# Altium PCB Morpheus_middle.PcbDoc (part 1 of 3)
Units mm, origin at the board's own origin, x right, y up, seen from the top; angles counter-clockwise.
Board outline 54.01 x 53.97 mm, 6 copper layers (Top Layer, Signal Layer 1, Signal Layer 2, GND, PWR, Bottom Layer), stack 0.657 mm thick; 151 components, 110 nets, 517 pads, 447 vias.
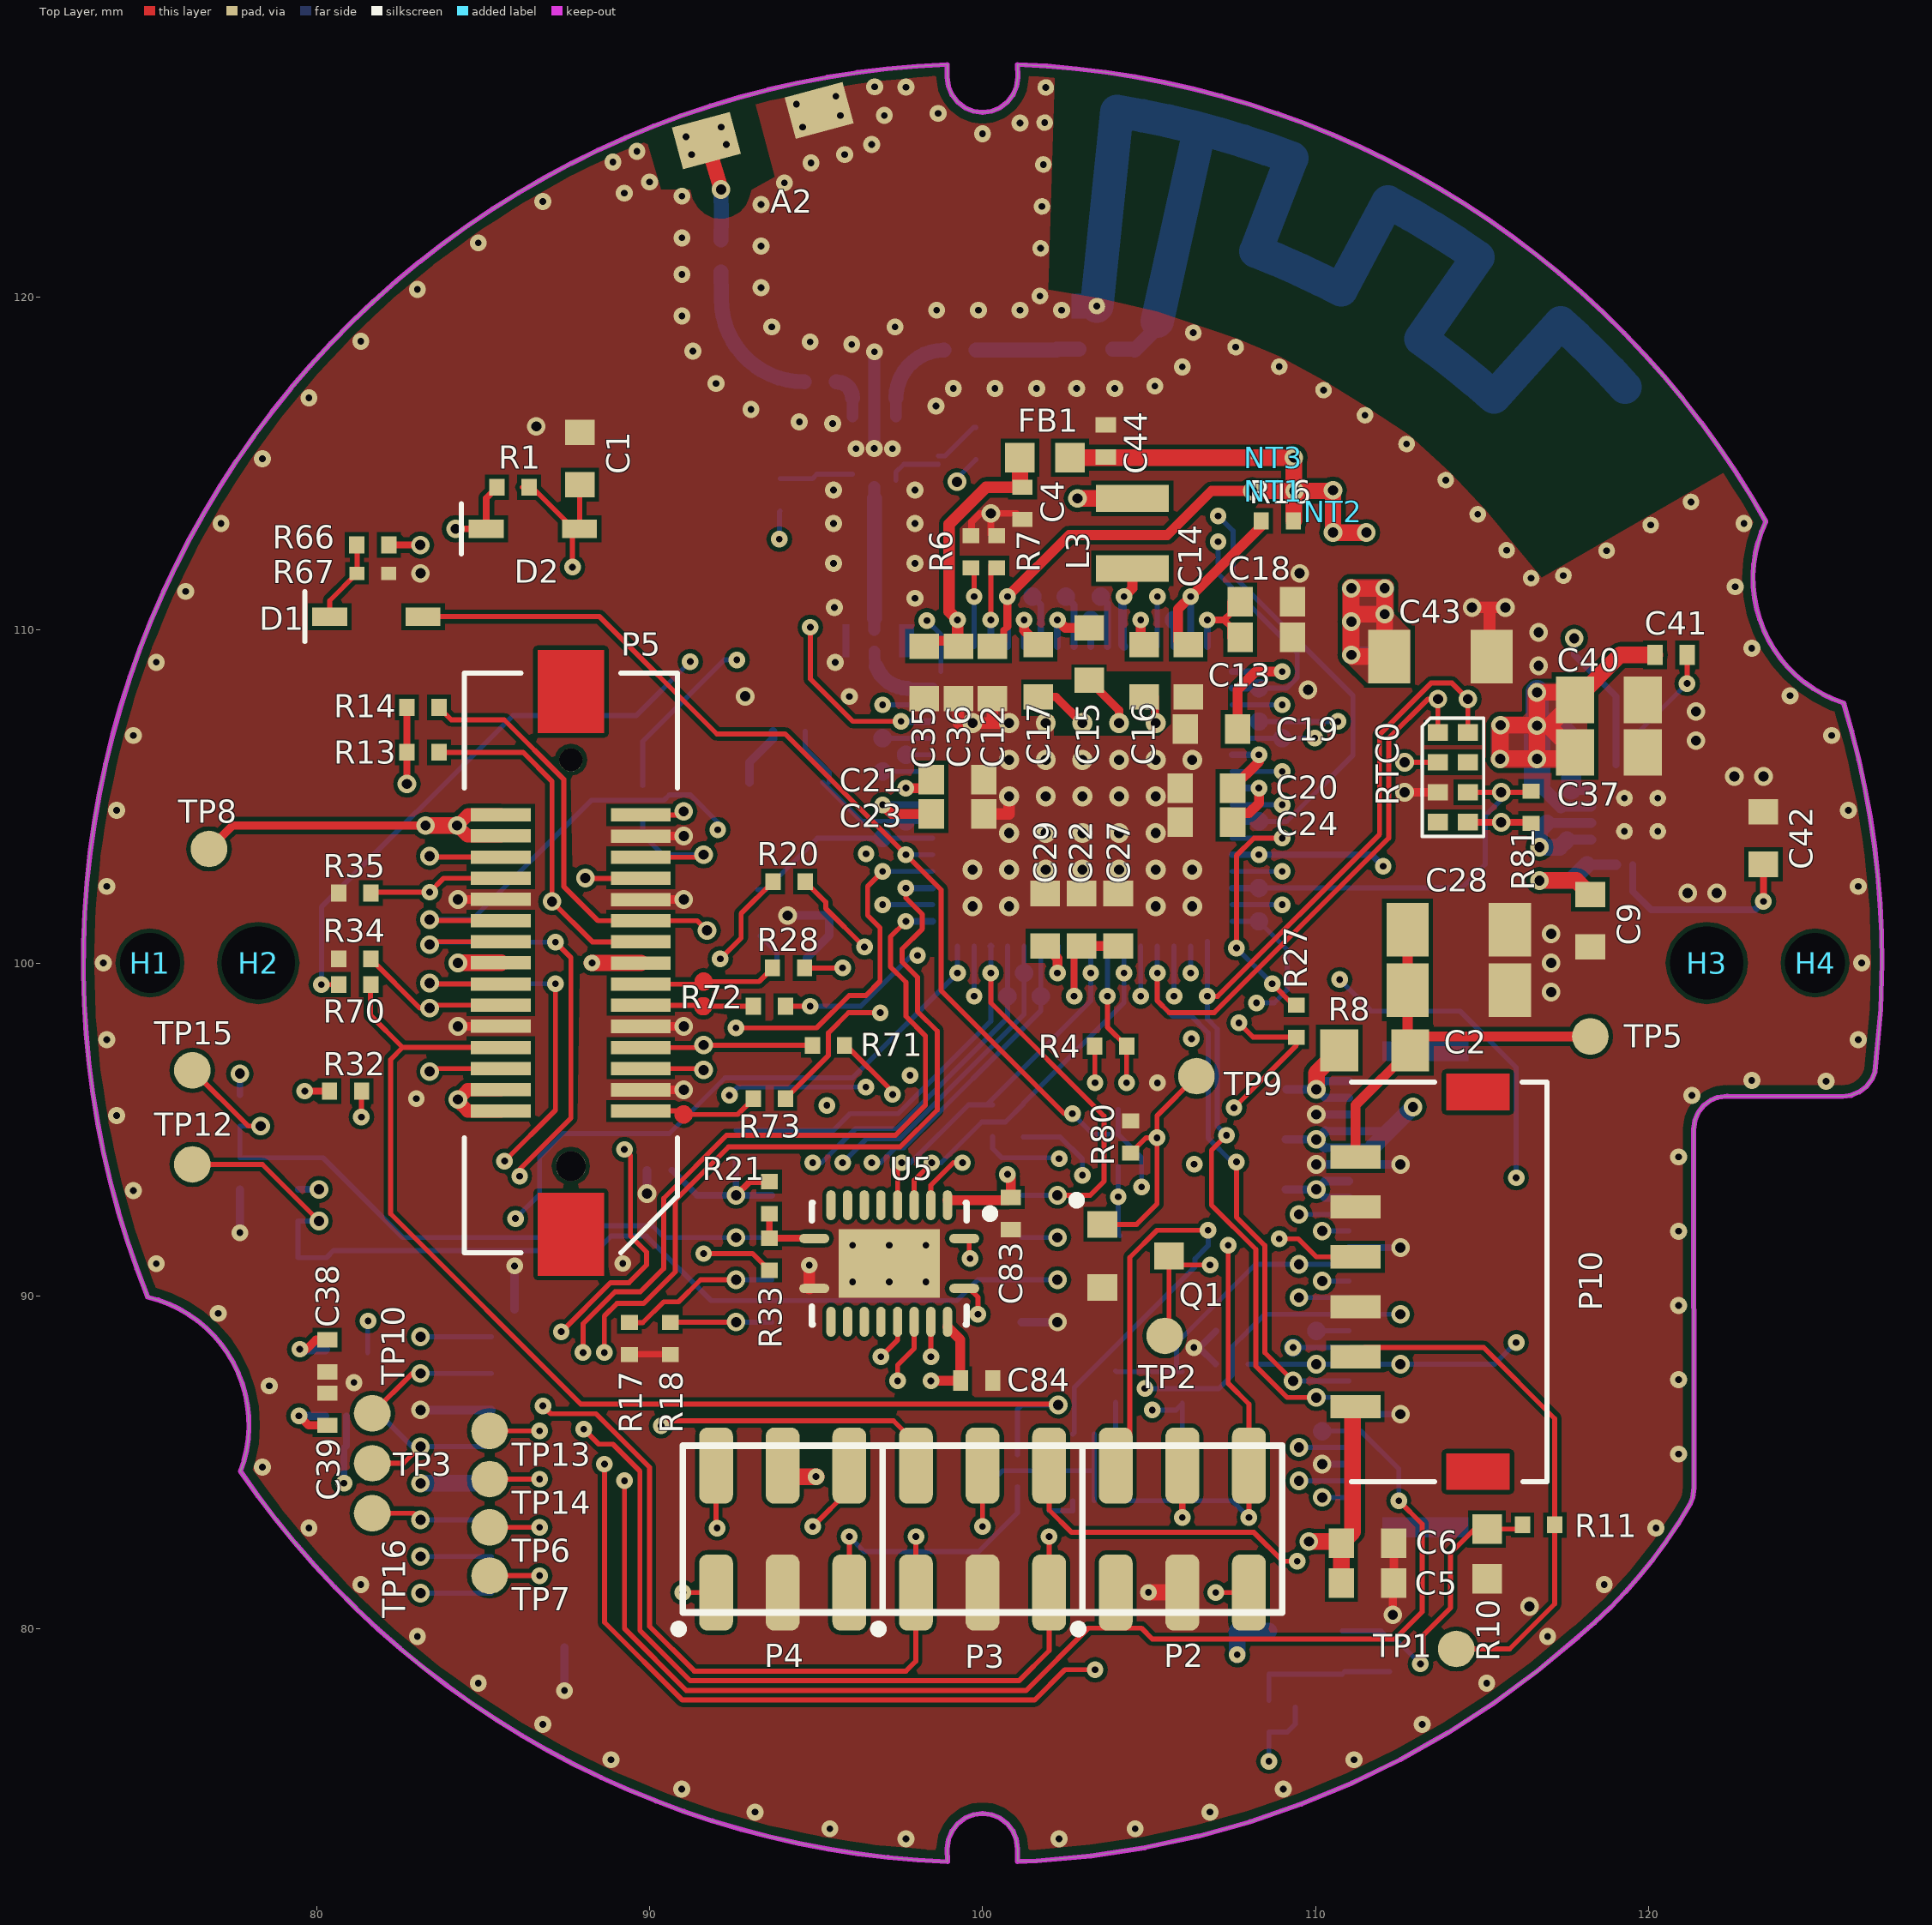
[diagram p0: Top Layer view]
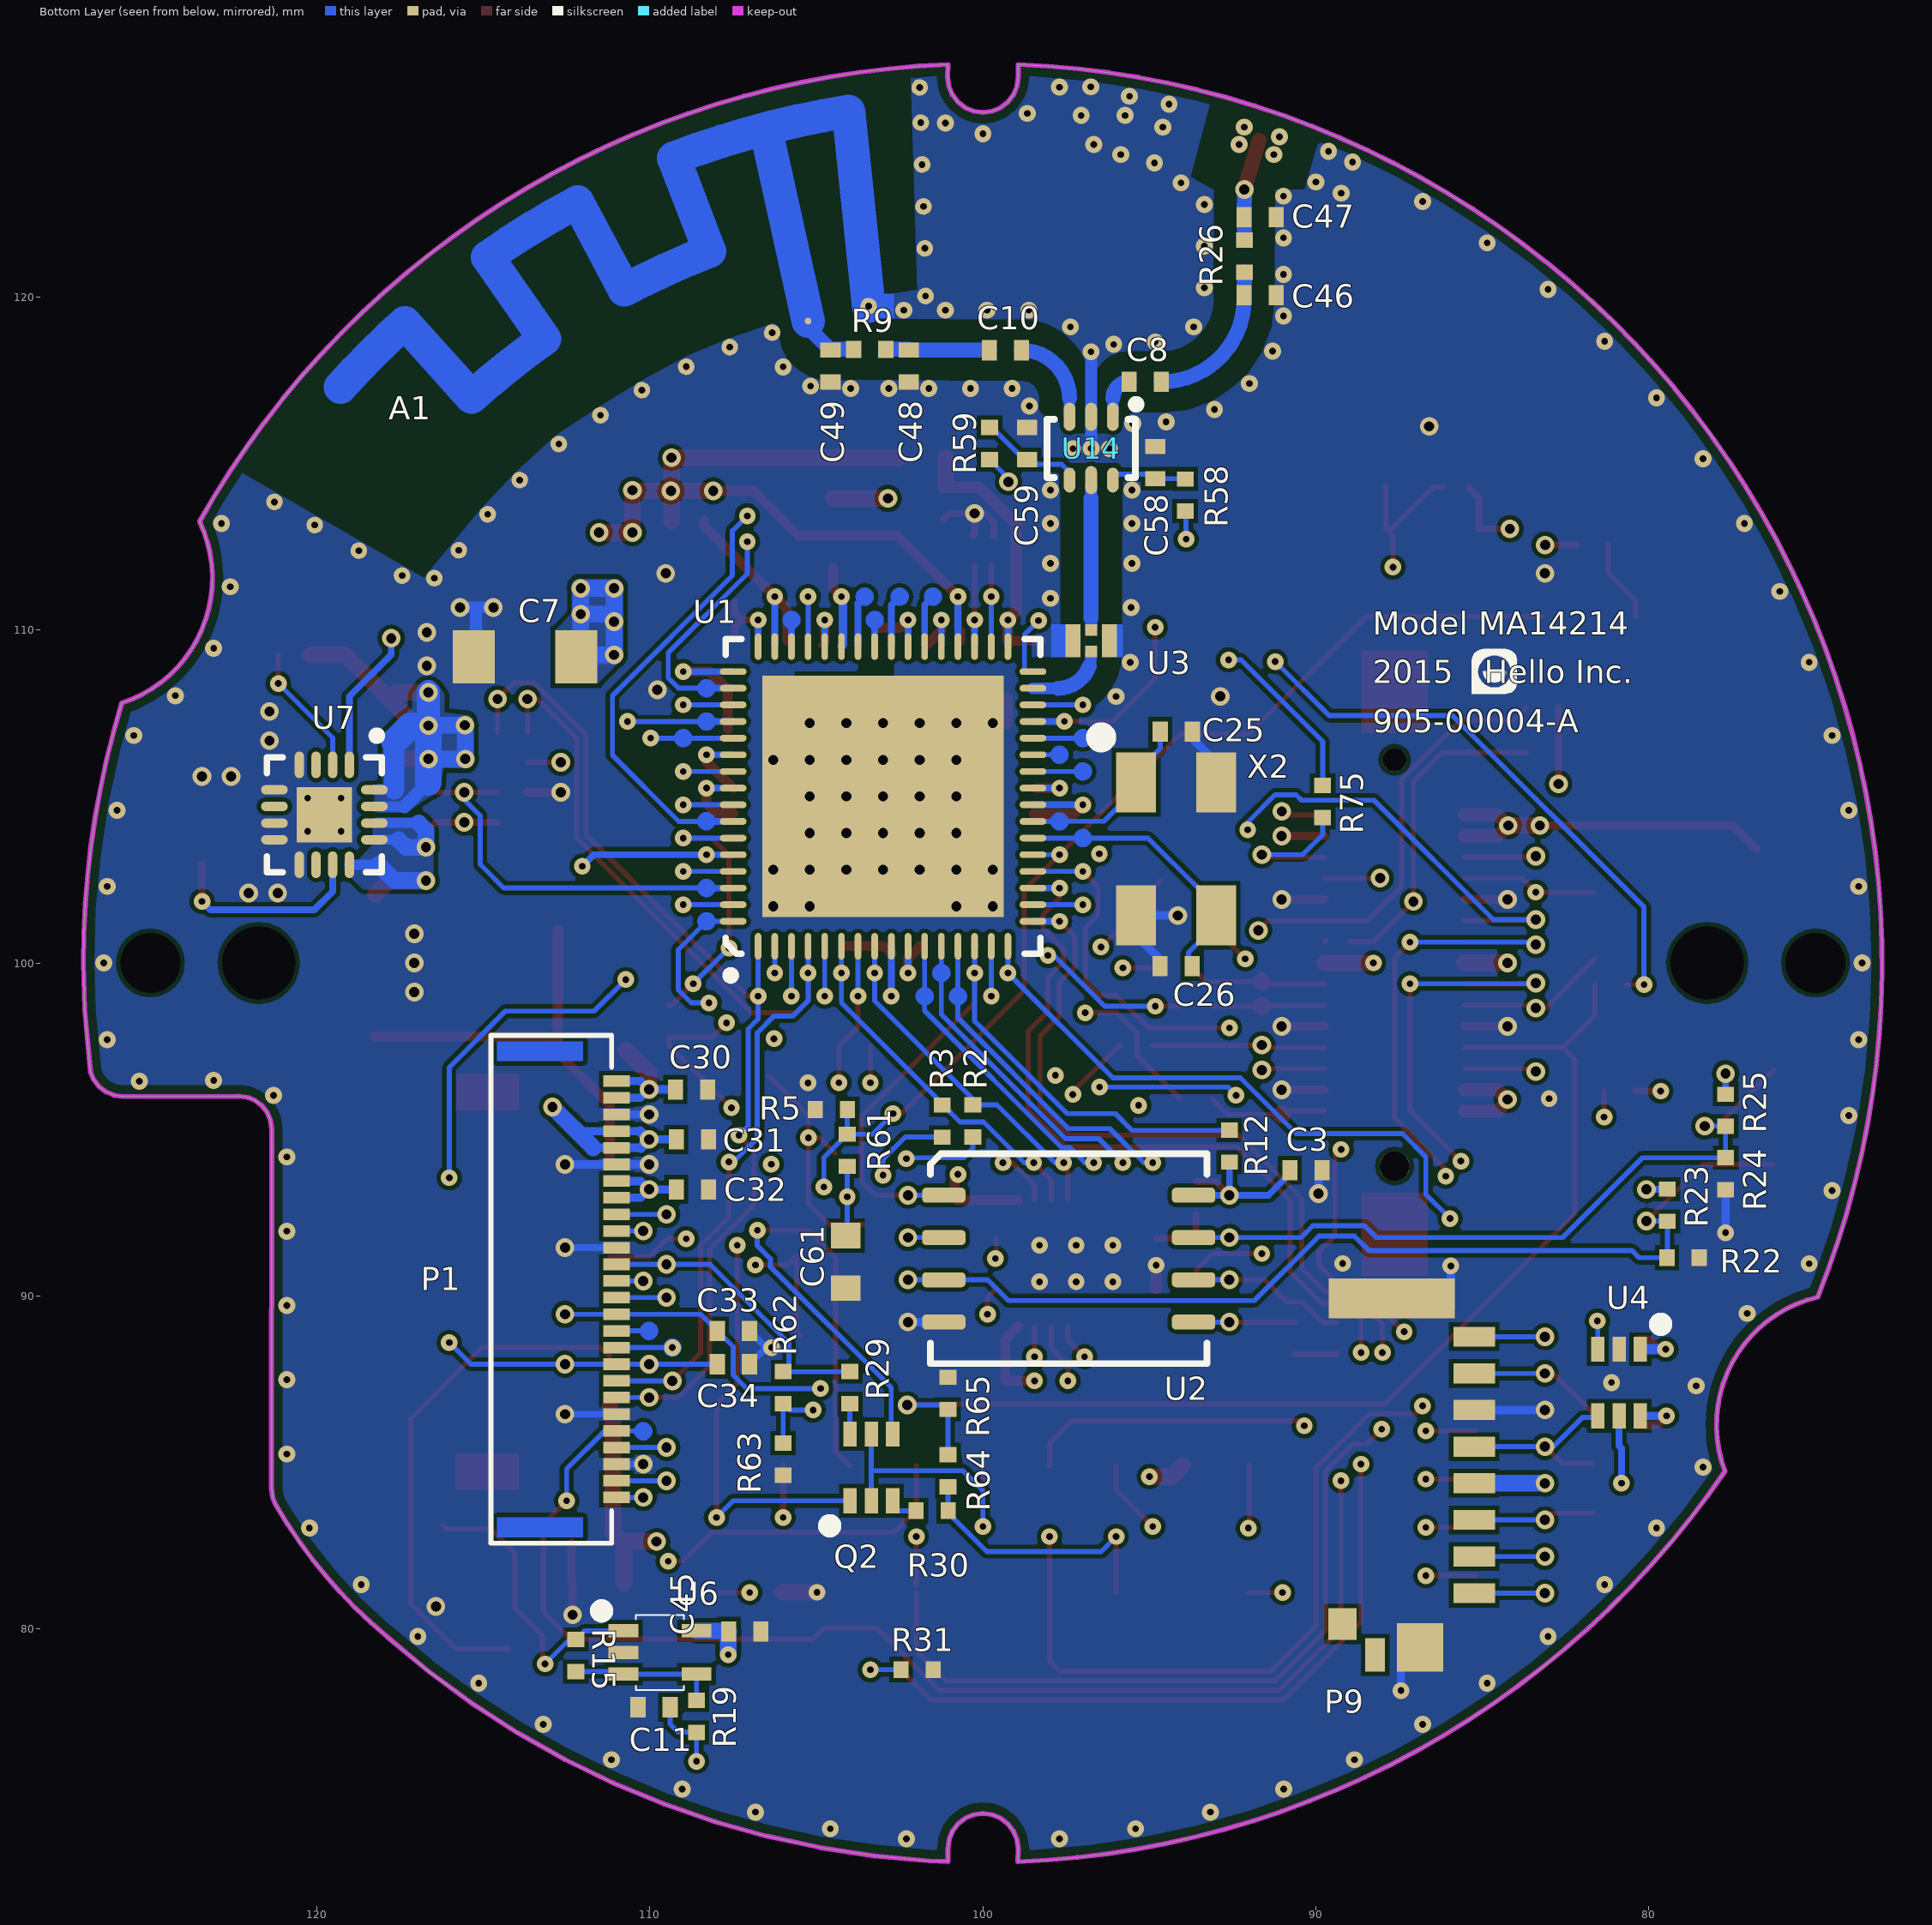
[diagram p1: Bottom Layer view, seen from below]
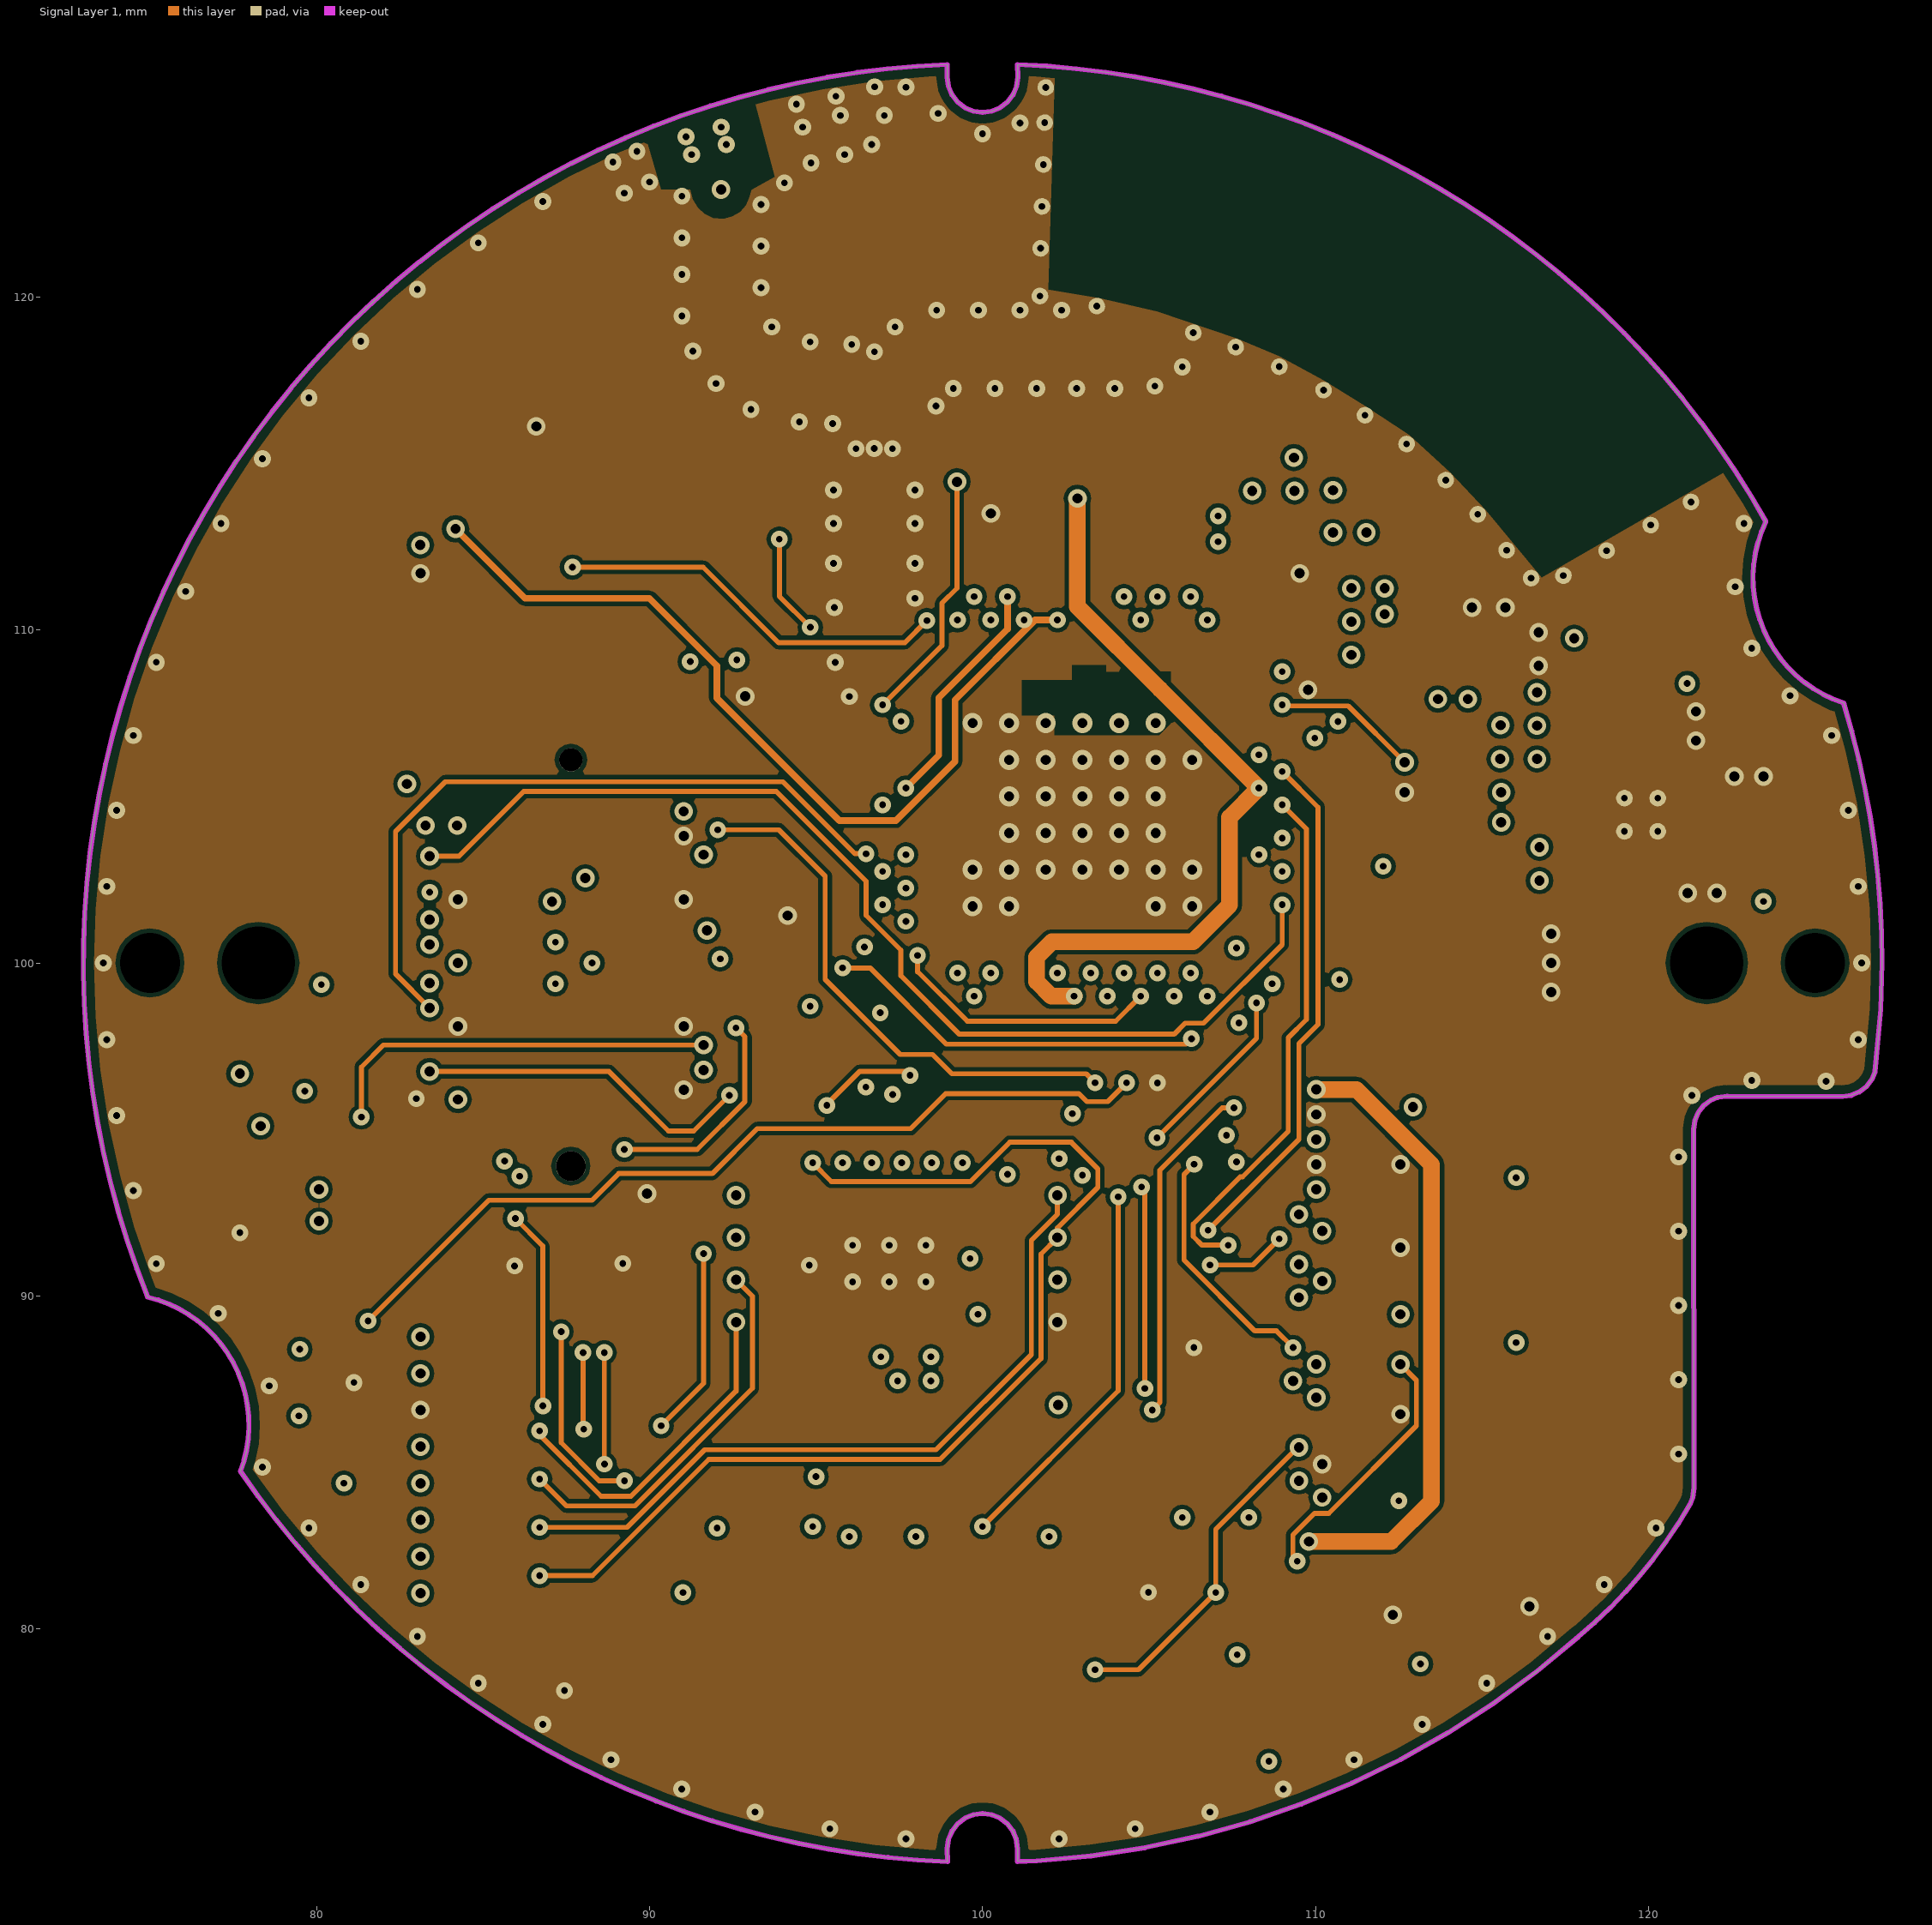
[diagram p2: Signal Layer 1]
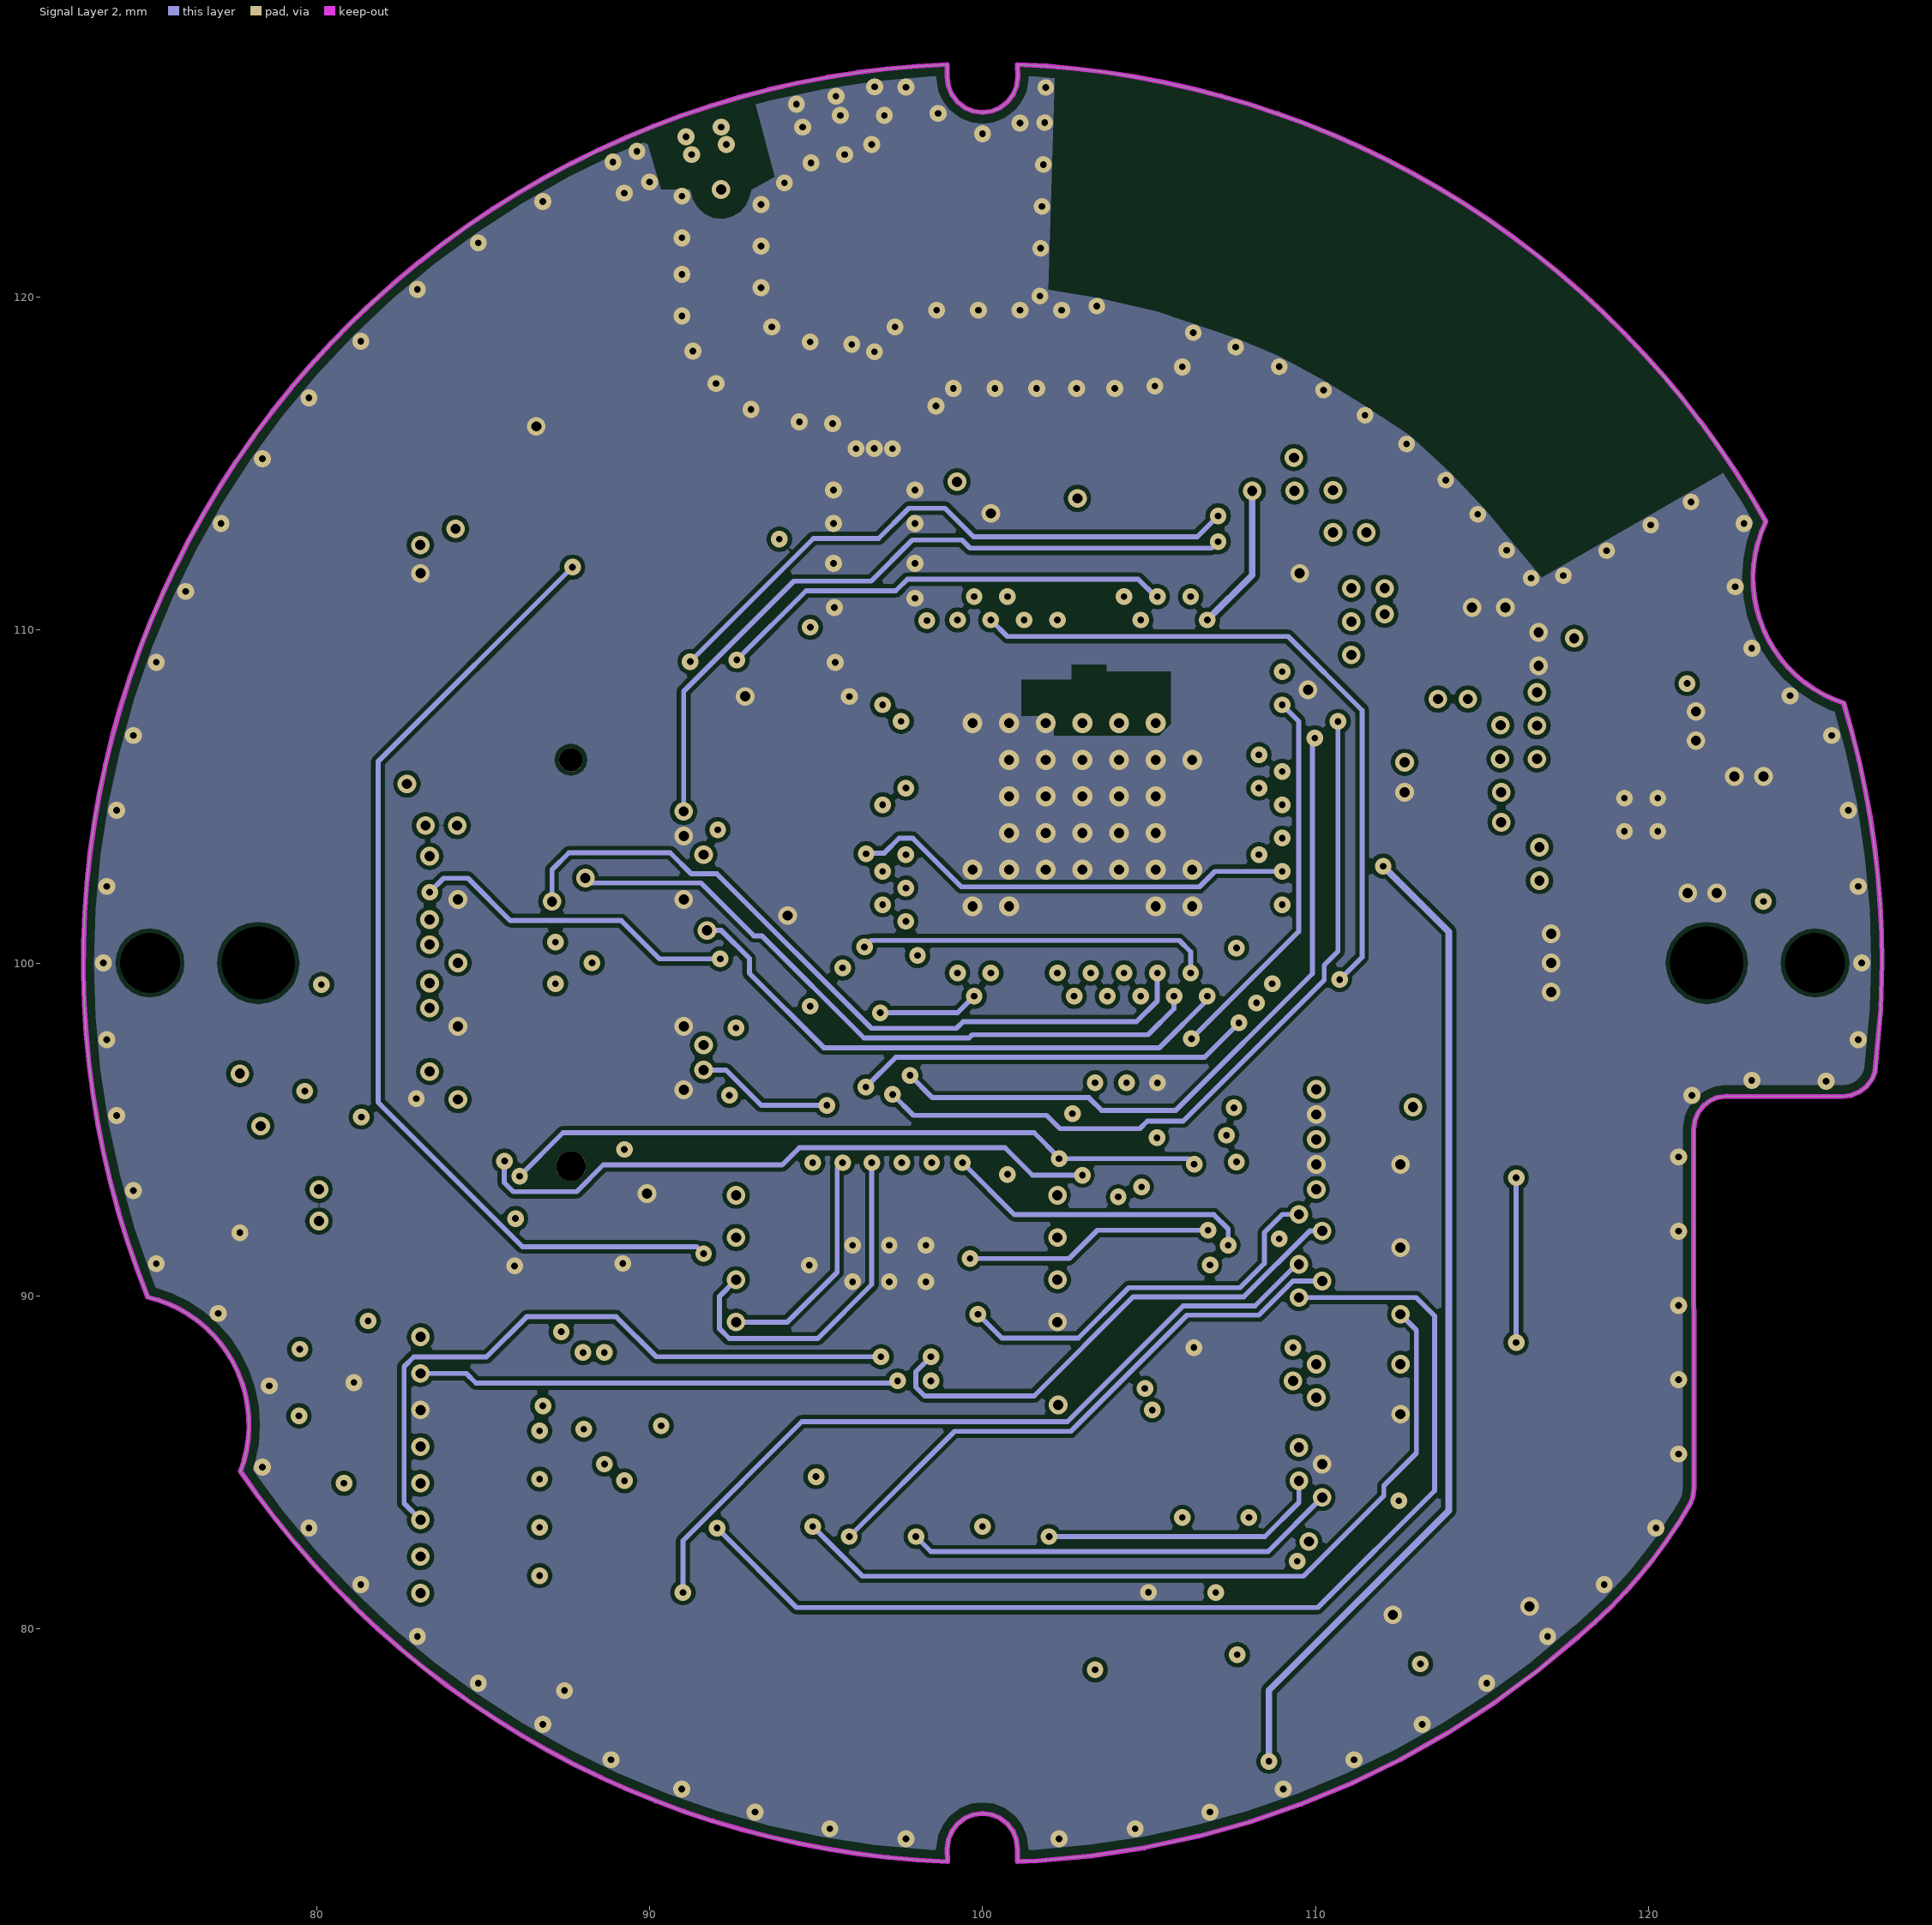
[diagram p3: Signal Layer 2]
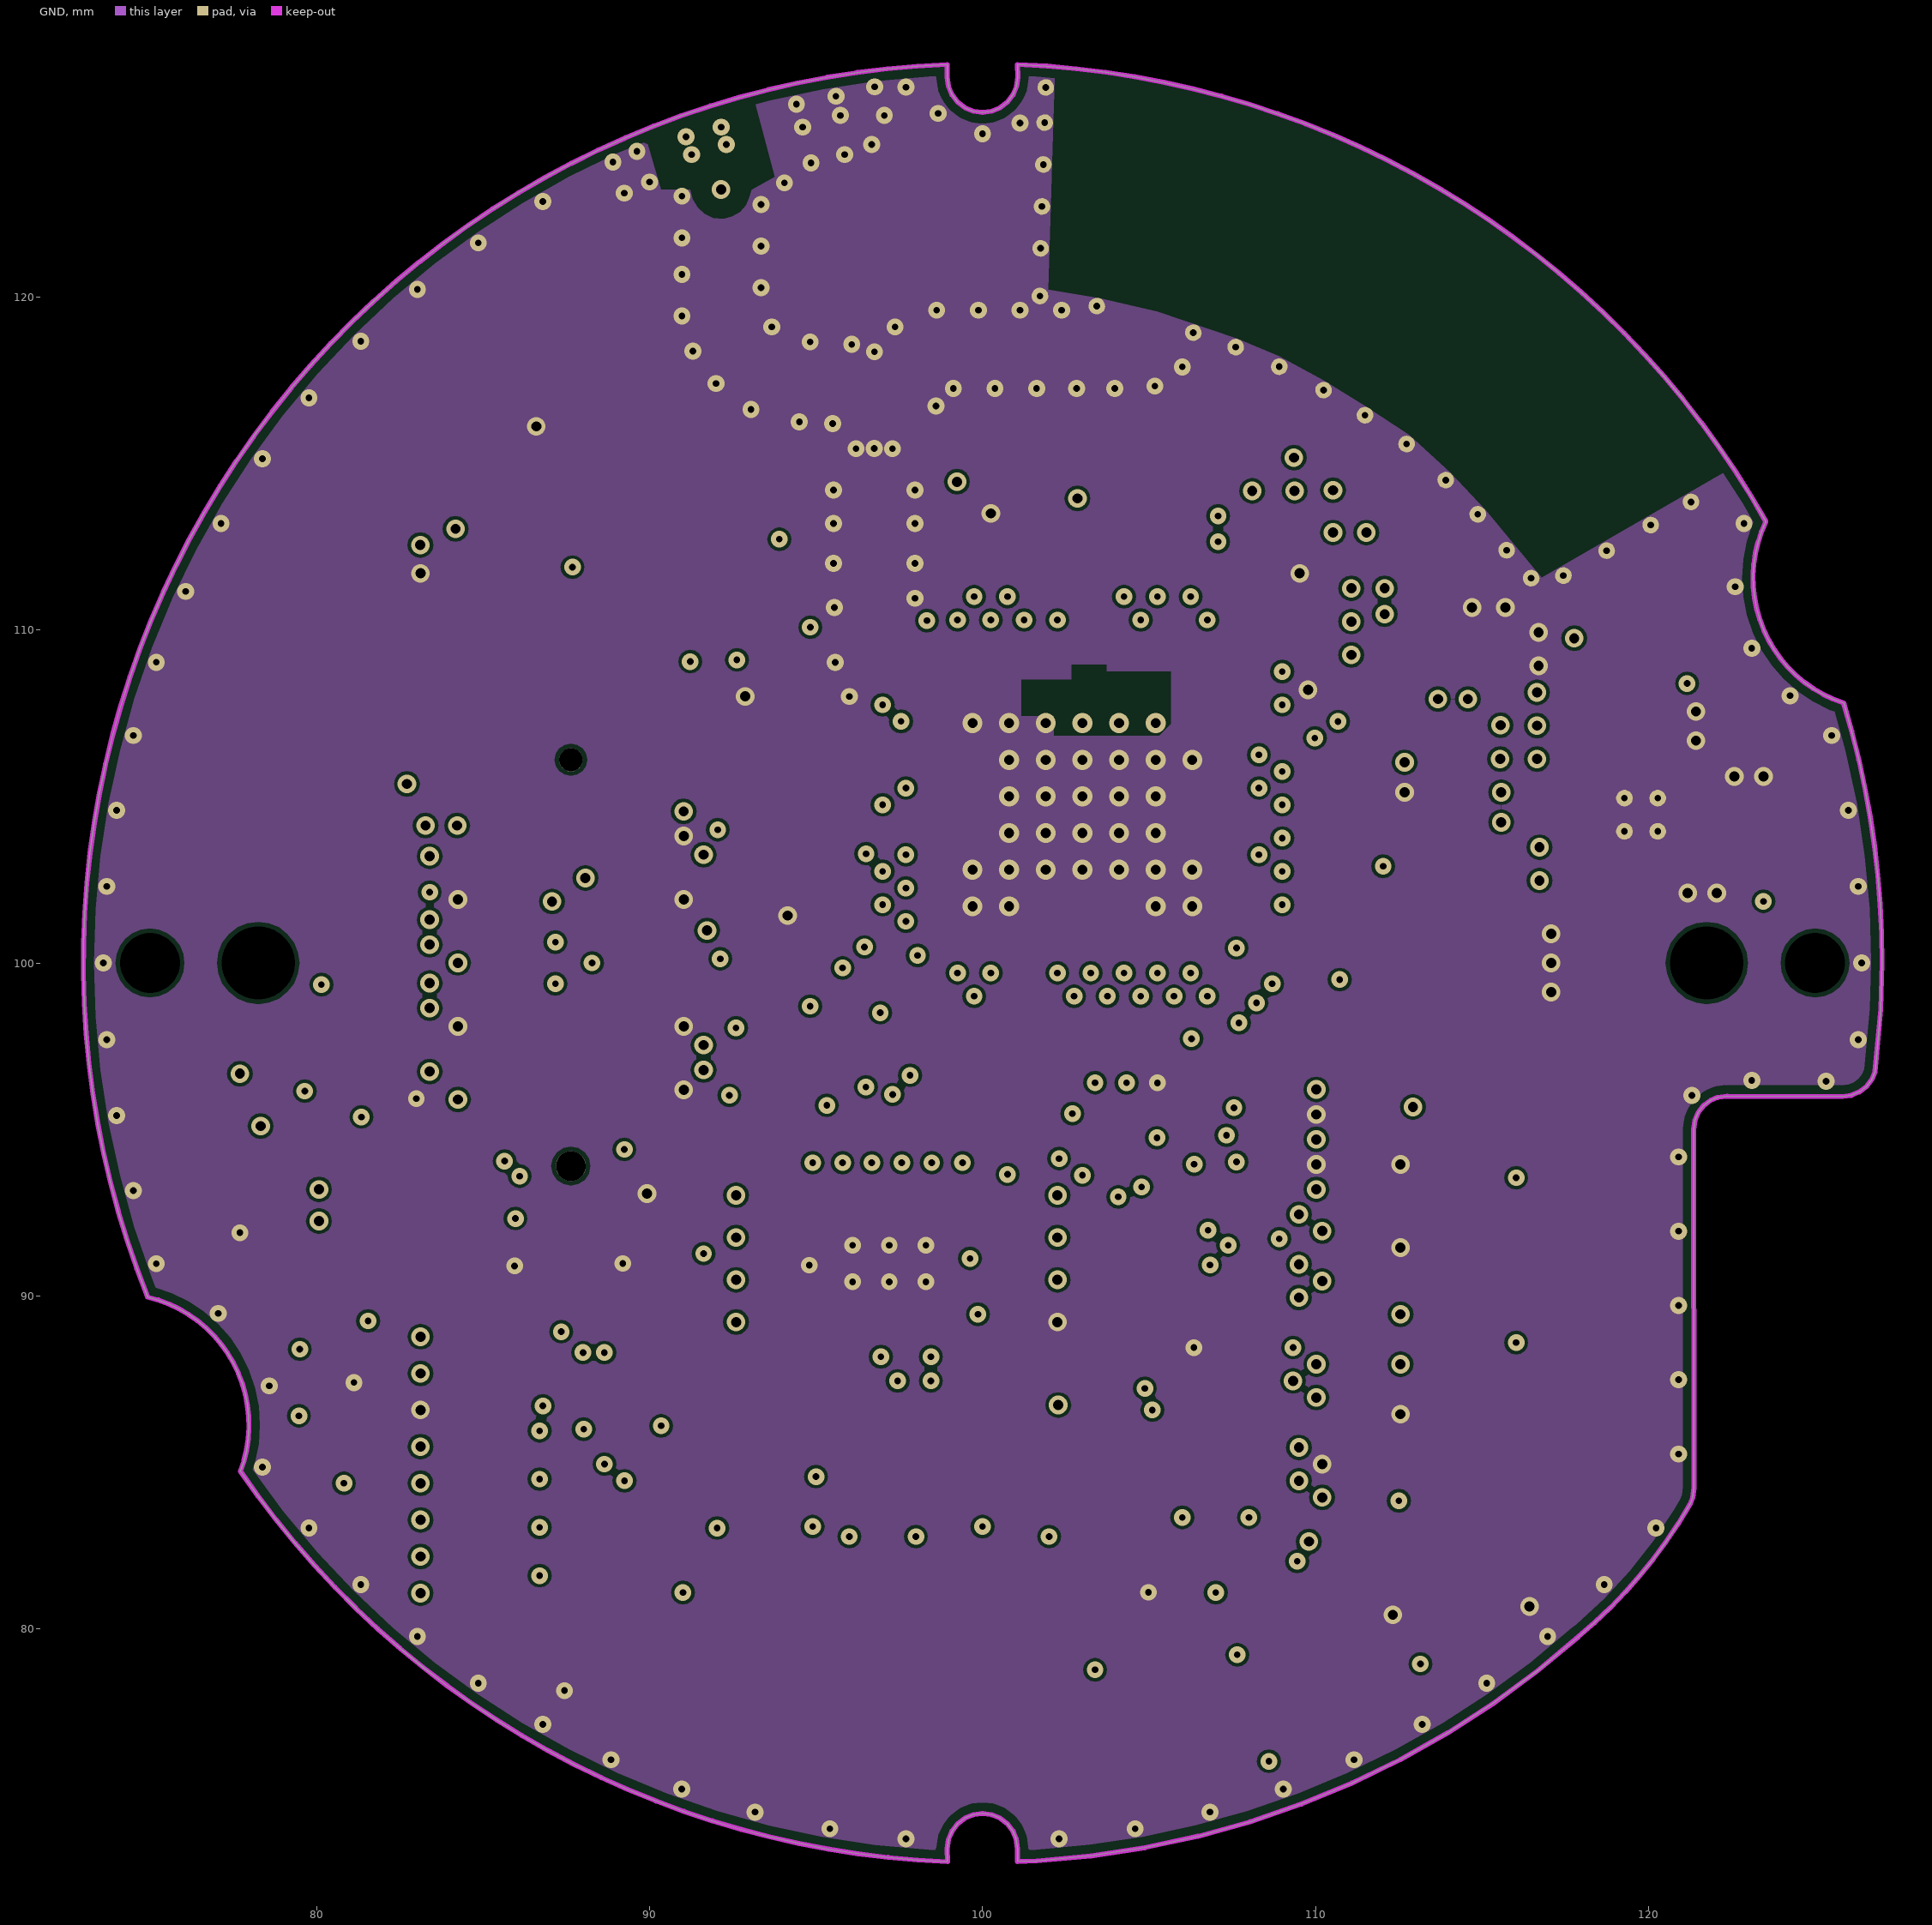
[diagram p4: GND]
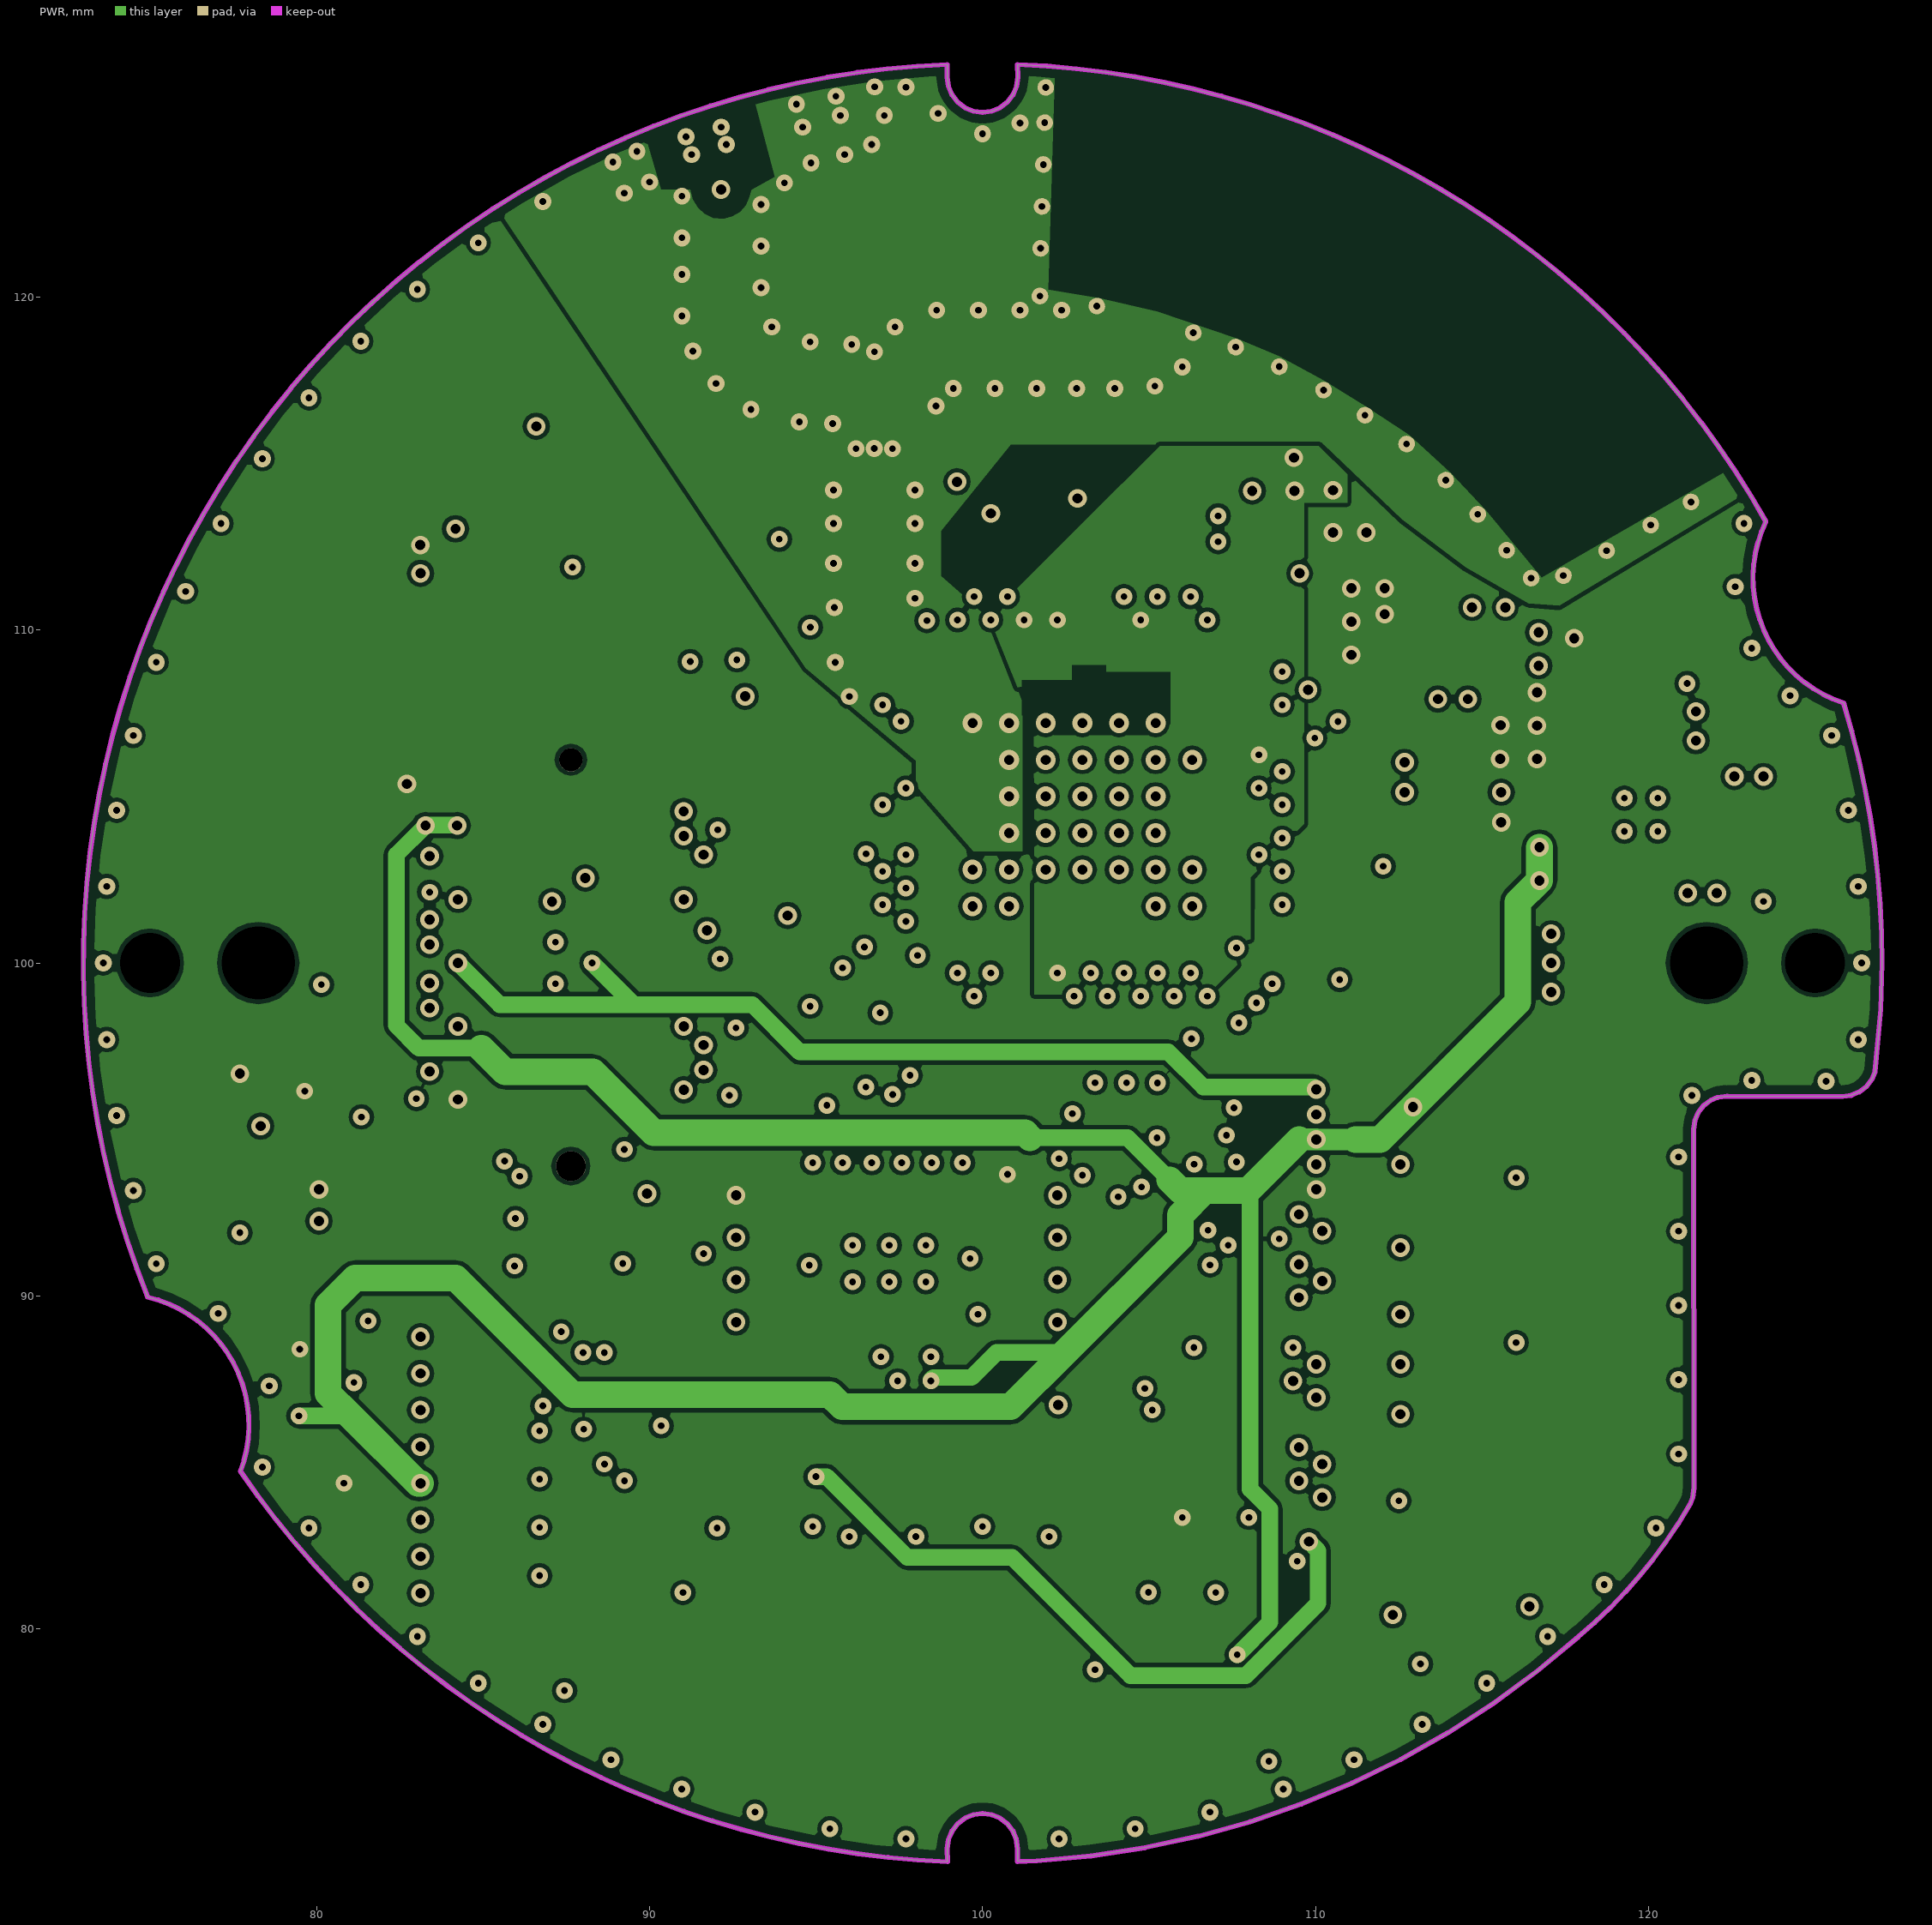
[diagram p5: PWR]

## Layer stack, top to bottom
Top Solder: solder mask 0.0102, Solder Resist, Dk 3.5
Top Layer: signal copper 0.0254
Dielectric1: prepreg 0.1016, FR-4, Dk 4.2
Signal Layer 1: signal copper 0.0254
Dielectric 5: core 0.1, Dk 4.2
Signal Layer 2: signal copper 0.0254
Dielectric 4: prepreg 0.1016, Dk 4.2
GND: signal copper 0.0254
Dielectric2: core 0.1, Dk 4.2
PWR: signal copper 0.0254
Dielectric3: prepreg 0.1016, Dk 4.2
Bottom Layer: signal copper 0.0254
Bottom Solder: solder mask 0.0102, Solder Resist, Dk 3.5

## Board outline
98.95,73.02 98.941,73.4 98.977,73.674 99.083,73.93 99.251,74.149 99.47,74.317 99.726,74.423 100,74.459 100.274,74.423 100.53,74.317 100.749,74.149 100.917,73.93 101.01,73.706 101.05,73.4 101.05,73.019 101.631,73.037 103.256,73.185 104.869,73.43 106.465,73.773 108.036,74.211 109.579,74.743 111.086,75.367 112.553,76.082 113.975,76.883 115.345,77.769 116.659,78.736 117.89,79.762 ccw(c108.371,91.183) 121.238,83.734 121.326,83.946 121.364,84.238 121.356,95 121.39,95.261 121.491,95.504 121.651,95.713 121.86,95.873 122.073,95.962 122.364,96 125.826,95.991 126.087,96.026 126.331,96.126 126.54,96.287 126.7,96.496 126.801,96.739 126.97,98.605 127.012,100 ccw(c100,100) 125.859,107.808 125.854,107.806 cw(c127.087,111.558) 123.521,113.257 ccw(c100,100) 101.05,126.98 101.05,126.981 101.059,126.6 101.023,126.326 100.917,126.071 100.749,125.851 100.53,125.683 100.274,125.577 100,125.541 99.726,125.577 99.47,125.683 99.251,125.851 99.083,126.071 98.977,126.326 98.941,126.6 98.941,126.98 ccw(c100,100) 74.931,89.97 74.93,89.969 cw(c74.023,86.125) 77.72,84.732 ccw(c100,100)

## Design rules (kind name [scope] priority, off if disabled: settings)
AssemblyTestpoint [(IsPad And (OnTopLayer Or OnBottomLayer))] p1: testpointundercomponent=FALSE minsize=0.3 maxsize=2.54 preferedsize=0.6 minholesize=0 maxholesize=1.016 preferedholesize=0 testpointgrid=0.025 usegrid=TRUE gridtolerance=0 allowsidetop=TRUE allowsidebottom=TRUE minspacing=1 compbodyclearance=1 boardedgeclearance=1
Clearance "Board clearance" [InPolygon vs OnLayer('Keep-Out Layer')] p1: gap=0.254
Clearance "GND pour" [(InNamedPolygon('GND on GND')) vs IsVia] p2: gap=0.1
Clearance "BOB clearance" [InComponentClass('BOB') vs InComponentClass('BOB')] p3 off: gap=0
Clearance "Hole clearance" [All vs (InPadClass('NPTH'))] p4: gap=0.3
Clearance [All] p5: gap=0.125
ComponentClearance "BOB connectors" [InComponentClass('BOB') vs InComponentClass('BOB')] p1: gap=0 collisioncheckmode=3 verticalgap=2540 showdistances=FALSE
ComponentClearance [All] p2: gap=0.2 collisioncheckmode=3 verticalgap=0.2 showdistances=FALSE
DiffPairsRouting [All] p1: maxlimit=0.254 minlimit=0.15 mostfreqgap=0.254 toplayer_prefgap=0.15 toplayer_minwidth=0.381 toplayer_maxwidth=0.381 toplayer_prefwidth=0.381 midlayer1_minwidth=0.381 midlayer1_maxwidth=0.381 midlayer1_prefwidth=0.381 midlayer2_minwidth=0.381 midlayer2_maxwidth=0.381 midlayer2_prefwidth=0.381 midlayer3_minwidth=0.381 midlayer3_maxwidth=0.381 midlayer3_prefwidth=0.381 midlayer4_minwidth=0.381 midlayer4_maxwidth=0.381 midlayer4_prefwidth=0.381 bottomlayer_prefgap=0.15 bottomlayer_minwidth=0.381 bottomlayer_maxwidth=0.381 bottomlayer_prefwidth=0.381 maxuncoupledlength=12.7
FabricationTestpoint [(IsPad And (OnTopLayer Or OnBottomLayer))] p1: side=3 testpointundercomponent=TRUE minsize=0.3 maxsize=2.54 preferedsize=0.6 minholesize=0 maxholesize=1.016 preferedholesize=0 testpointgrid=0.025 allowsidetop=TRUE allowsidebottom=TRUE usegrid=TRUE gridtolerance=0 minspacing=1 compbodyclearance=1 boardedgeclearance=1
FanoutControl Fanout_Default [All] p5: bgadir=Out bgaviamode=Centered fanoutstyle=Staggered fanoutdirection=Alternating viagrid=0.025 // Fanout_Default (Default Rule)
HoleSize [All] p1 off: absolutevalues=TRUE maxlimit=5 minlimit=0.35 maxpercent=80.000 minpercent=20.000
MinimumSolderMaskSliver [All] p1 off: minsoldermaskwidth=0.254
PasteMaskExpansion [All] p1: expansion=-0.05
PolygonConnect PolygonConnect_17 [All vs IsNamedPolygon('VBAT')] p1: connectstyle=Direct reliefconductorwidth=0.254 reliefentries=4 polygonreliefangle="90 Angle" airgapwidth=0.254
PolygonConnect PolygonConnect_16 [All vs IsNamedPolygon('1.8V AT BULK CAP TOP')] p2: connectstyle=Direct reliefconductorwidth=0.254 reliefentries=4 polygonreliefangle="90 Angle" airgapwidth=0.254
PolygonConnect PolygonConnect_15 [All vs IsNamedPolygon('1.8V AT BULK CAP BOT')] p3: connectstyle=Direct reliefconductorwidth=0.254 reliefentries=4 polygonreliefangle="90 Angle" airgapwidth=0.254
PolygonConnect PolygonConnect_14 [All vs IsNamedPolygon('1.8V AT LDO on BOT')] p4: connectstyle=Direct reliefconductorwidth=0.254 reliefentries=4 polygonreliefangle="90 Angle" airgapwidth=0.254
PolygonConnect PolygonConnect_13 [All vs IsNamedPolygon('1.8V AT LDO on Top')] p5: connectstyle=Direct reliefconductorwidth=0.254 reliefentries=4 polygonreliefangle="90 Angle" airgapwidth=0.254
PolygonConnect PolygonConnect_12 [All vs IsNamedPolygon('3.3V')] p6: connectstyle=Direct reliefconductorwidth=0.254 reliefentries=4 polygonreliefangle="90 Angle" airgapwidth=0.254
PolygonConnect PolygonConnect_11 [All vs IsNamedPolygon('1.8V')] p7: connectstyle=Direct reliefconductorwidth=0.254 reliefentries=4 polygonreliefangle="90 Angle" airgapwidth=0.254
PolygonConnect PolygonConnect_10 [All vs IsNamedPolygon('GND')] p8: connectstyle=Direct reliefconductorwidth=0.254 reliefentries=4 polygonreliefangle="90 Angle" airgapwidth=0.254
PolygonConnect PolygonConnect_9 [All vs IsNamedPolygon('GND on GND')] p9: connectstyle=Direct reliefconductorwidth=0.254 reliefentries=4 polygonreliefangle="90 Angle" airgapwidth=0.254
PolygonConnect PolygonConnect_8 [All vs IsNamedPolygon('Sig1 GND')] p10: connectstyle=Direct reliefconductorwidth=0.254 reliefentries=4 polygonreliefangle="90 Angle" airgapwidth=0.254
PolygonConnect PolygonConnect_7 [All vs IsNamedPolygon('VBAT')] p11: connectstyle=Direct reliefconductorwidth=0.254 reliefentries=4 polygonreliefangle="90 Angle" airgapwidth=0.254
PolygonConnect PolygonConnect_6 [All vs IsNamedPolygon('Sig2 GND')] p12: connectstyle=Direct reliefconductorwidth=0.254 reliefentries=4 polygonreliefangle="90 Angle" airgapwidth=0.254
PolygonConnect PolygonConnect_5 [All vs IsNamedPolygon('Sig1 GND')] p13: connectstyle=Direct reliefconductorwidth=0.254 reliefentries=4 polygonreliefangle="90 Angle" airgapwidth=0.254
PolygonConnect PolygonConnect_4 [All vs IsNamedPolygon('Top GND')] p14: connectstyle=Direct reliefconductorwidth=0.254 reliefentries=4 polygonreliefangle="90 Angle" airgapwidth=0.254
PolygonConnect PolygonConnect_3 [All vs IsNamedPolygon('Bottom GND')] p15: connectstyle=Direct reliefconductorwidth=0.254 reliefentries=4 polygonreliefangle="90 Angle" airgapwidth=0.254
PolygonConnect PolygonConnect_2 [All vs IsNamedPolygon('VBAT')] p16: connectstyle=Direct reliefconductorwidth=0.254 reliefentries=4 polygonreliefangle="90 Angle" airgapwidth=0.254
PolygonConnect PolygonConnect_1 [All vs IsNamedPolygon('1.8V')] p17: connectstyle=Direct reliefconductorwidth=0.254 reliefentries=4 polygonreliefangle="90 Angle" airgapwidth=0.254
PolygonConnect PolygonConnect_RF [All vs InComponentClass('RF_no_relief')] p18: connectstyle=Direct reliefconductorwidth=0.254 reliefentries=4 polygonreliefangle="90 Angle" airgapwidth=0.254
PolygonConnect PolygonConnect_Vias_guard_ring [All vs (ViaDiameter = AsMM(0.51))] p19: connectstyle=Direct reliefconductorwidth=0.254 reliefentries=4 polygonreliefangle="90 Angle" airgapwidth=0.254 // no relief for vias on the external stiching ring
PolygonConnect "Polygon Connect Net Tie" [(InComponentClass('Net Tie'))] p20: connectstyle=Direct reliefconductorwidth=0.254 reliefentries=4 polygonreliefangle="90 Angle" airgapwidth=0.254
PolygonConnect [All] p21: connectstyle=Relief reliefconductorwidth=0.35 reliefentries=4 polygonreliefangle="90 Angle" airgapwidth=0.15
RoomDefinition Wires_bottom_board [False] p1: confinementstyle=ConfineOut formatcopy=TRUE lockcomponents=FALSE outline 117.8,97.825 117.8,82.572 127.92,82.572 127.92,97.822
RoomDefinition Dust_sensor_wires [InComponentClass('M4F_MCU_Antennas')] p2: confinementstyle=ConfineOut formatcopy=TRUE lockcomponents=FALSE outline 117,96.484 117,84.475 127.122,84.475 127.122,96.482
RoutingCorners [All] p1: cornerstyle=45-Degree minsetback=1 maxsetback=5
RoutingVias [All] p1: holewidth=0.305 width=0.559 viastyle="Through Hole" minholewidth=0.2 minwidth=0.5 maxholewidth=1 maxwidth=1
ShortCircuit "Net tie" [InComponentClass('Net_tie')] p1: allowed=TRUE
ShortCircuit [All] p2: allowed=FALSE
SilkToSilkClearance [All] p1 off: silktosilkclearance=0.254
SilkToSolderMaskClearance [IsPad] p1 off: minsilkscreentomaskgap=0.254 clearancetoexposedcopper=TRUE
SolderMaskExpansion [All] p1: expansion=0.07
Width "Antenna width" [InNetClass('Antenna')] p1: maxlimit=0.45 minlimit=0.3 preferedwidth=0.45
Width "Power width" [InNetClass('Power')] p2: maxlimit=1 minlimit=0.2 preferedwidth=0.25
Width [All] p3: maxlimit=2 minlimit=0.15 preferedwidth=0.15
17 further rules are at their usual default settings.

## Classes and differential pairs
component class SD_Card: C38 C39 P9 TP3 TP10 TP16 U4
component class BOB: P2 P3 P4
net class Power: 1.2V 1.8V 3.3V 5V ANA2_SW DCDC_ANA_SW DCDC_DIG_SW DCDC_PA_OUT DCDC_PA_SW_N DCDC_PA_SW_P GND LDO_IN VBAT VDD_ANA2 VDD_PA_IN_FILTERED VDD_PLL VDD_RAM
net class Antenna: EIFA_SIG1 PIFA_SIG1 PIFA_SIG2 RF_BG RF_OUT1 RF_OUT2 SAW_FILTER_OUT
component class M4F_MCU_Antennas: A1 A2 C8 C10 C46 C47 C48 C49 C58 C59 R9 R26 R58 R59 U3 U14
component class Flash: C3 R12 R17 R18 R22 R23 R24 R25 TP6 TP7 TP12 TP13 TP14 TP15 U2
component class Morpheus_middle: C30 C31 C32 C33 C34 C83 C84 H1 H2 H3 H4 P1 P5 R2 R3 R4 R13 R14 R21 R28 R31 R32 R33 R34 R35 TP8 U5
component class M4F_MCU: C1 C25 C26 C61 D1 D2 P2 P3 P4 Q2 R1 R5 R6 R7 R20 R27 R29 R30 R61 R62 R63 R64 R65 R66 R67 R70 R71 R72 R73 R75 R81 RTC0 U1 X2
component class M4F_MCU_Power: C4 C7 C9 C12 C13 C14 C15 C16 C17 C18 C19 C20 C21 C22 C23 C24 C27 C29 C35 C36 C37 C40 C41 C42 C43 C44 FB1 L3 NT1 NT2 NT3 R16 U7
component class Air_quality: C2 C5 C6 C11 C28 C45 P10 Q1 R8 R10 R11 R15 R19 R80 TP1 TP2 TP5 TP9 U6
component class Net_tie: NT1 NT3
component class RF_no_relief: A1 A2 C1 C2 C7 C8 C10 C33 C46 C47 C48 C49 C58 C59 R9 U3 U14

## Components (designator, comment, footprint, x,y, rotation, side; value= is the part's Value field where it differs from the comment)
A1 "PCB Antenna" Antenna_meander_2.4GHz_middle 108.687,119.576 r185 bottom locked net-tie
A2 "Antenna_IFA_pads" Antenna_Pads 93.4,125.15 r15 top
C1 "10u" CAP0603_SENSE_DVT 87.911,115.15 r270 top
C2 "100u" CAP1206_SENSE_DVT 114.3,99.182 r180 top
C3 "0.1u" CAP0402_SENSE_DVT 90.3,93.775 r0 bottom
C4 "2200p" CAP0402_SENSE_DVT 101.2,113.8 r90 top
C5 "0.1u" CAP0603_SENSE_DVT 111.565,81.38 r180 top
C6 "10u" CAP0603_SENSE_DVT 111.565,82.58 r180 top
C7 "DNP" CAP1206_SENSE_DVT 113.75,109.189 r180 bottom
C8 "10 p" CAP0402_SENSE_DVT 95.125,117.45 r180 bottom
C9 "1u" CAP0603_SENSE_DVT 118.25,101.27 r90 top
C10 "10 p" CAP0402_SENSE_DVT 99.325,118.4 r0 bottom
C11 "10000p" CAP0402_SENSE_DVT 109.875,77.65 r180 bottom
C12 "10u" CAP0603_SENSE_DVT 100.3,108.725 r90 top
C13 "10u" CAP0603_SENSE_DVT 108.525,109.775 r180 top
C14 "0.1u" CAP0603_SENSE_DVT 106.175,108.775 r90 top
C15 "4.7u" CAP0603_SENSE_DVT 103.2,109.275 r90 top
C16 "4.7u" CAP0603_SENSE_DVT 104.85,108.775 r90 top
C17 "4.7u" CAP0603_SENSE_DVT 101.675,108.775 r90 top
C18 "0.1u" CAP0603_SENSE_DVT 108.525,110.85 r180 top
C19 "0.1u" CAP0603_SENSE_DVT 106.875,107.025 r0 top
C20 "0.1u" CAP0603_SENSE_DVT 106.725,105.25 r0 top
C21 "0.1u" CAP0603_SENSE_DVT 99.25,105.5 r180 top
C22 "0.1u" CAP0603_SENSE_DVT 102.975,101.3 r270 top
C23 "0.1u" CAP0603_SENSE_DVT 99.25,104.475 r180 top
C24 "0.1u" CAP0603_SENSE_DVT 106.725,104.225 r180 top
C25 "9p" CAP0402_SENSE_DVT 94.195,106.95 r0 bottom
C26 "9p" CAP0402_SENSE_DVT 94.2,99.9 r180 bottom
C27 "10u" CAP0603_SENSE_DVT 104.075,101.3 r270 top
C28 "100u" CAP1206_SENSE_DVT 114.3,101 r180 top
C29 "0.1u" CAP0603_SENSE_DVT 101.875,101.3 r270 top
C30 "2200p" CAP0402_SENSE_DVT 108.75,96.2 r180 bottom
C31 "2200p" CAP0402_SENSE_DVT 108.725,94.7 r180 bottom
C32 "2200p" CAP0402_SENSE_DVT 108.725,93.2 r180 bottom
C33 "2200p" CAP0402_SENSE_DVT 107.492,88.95 r180 bottom
C34 "2200p" CAP0402_SENSE_DVT 107.492,87.95 r180 bottom
C35 "0.1u" CAP0603_SENSE_DVT 98.25,108.725 r90 top
C36 "22u" CAP0603_SENSE_DVT 99.275,108.725 r90 top
C37 "10u" CAP0805_SENSE_DVT 118.811,106.325 r180 top
C38 "0.1u" CAP0402_SENSE_DVT 80.325,88.2 r90 top
C39 "0.1u" CAP0402_SENSE_DVT 80.325,86.6 r270 top
C40 "10u" CAP0805_SENSE_DVT 118.811,107.9 r180 top
C41 "220p" CAP0402_SENSE_DVT 120.675,109.25 r180 top
C42 "0.1u" CAP0603_SENSE_DVT 123.45,103.75 r270 top
C43 "DNP" CAP1206_SENSE_DVT 113.75,109.2 r180 top
C44 "2200p" CAP0402_SENSE_DVT 103.7,115.675 r270 top
C45 "0.1u" CAP0402_SENSE_DVT 107.15,79.925 r0 bottom
C46 "DNP" CAP0402_SENSE_DVT 91.675,120.05 r180 bottom
C47 "DNP" CAP0402_SENSE_DVT 91.675,122.4 r180 bottom
C48 "DNP" CAP0402_SENSE_DVT 102.225,117.925 r270 bottom
C49 "DNP" CAP0402_SENSE_DVT 104.575,117.925 r270 bottom
C58 "1000p" CAP0402_SENSE_DVT 94.825,115.025 r270 bottom
C59 "1000p" CAP0402_SENSE_DVT 98.675,115.6 r270 bottom
C61 "0.1u" CAP0603_SENSE_DVT 104.125,91.025 r270 bottom
C83 "0.1u" CAP0402_SENSE_DVT 100.85,92.475 r90 top
C84 "0.1u" CAP0402_SENSE_DVT 99.825,87.459 r180 top
D1 "1N4148WS" SOD-323 81.8,110.4 r0 top
D2 "1N4148WS" SOD-323 86.501,113.035 r0 top
FB1 "742792641" RES0603_SENSE_DVT 101.875,115.175 r0 top
H1 "DNP" HOLE_ROUND_1.8mm 75,100 r0 top
H2 "DNP" HOLE_ROUND_2.2mm 78.25,100 r0 top locked
H3 "DNP" HOLE_ROUND_2.2mm 121.75,100 r0 top locked
H4 "DNP" HOLE_ROUND_1.8mm 125,100 r0 top locked
L3 "2.2u" IND_1008 104.5,112.9 r270 top
NT1 "NT" Net_tie_50mil 108.725,114.175 r180 top net-tie
NT2 "NT" Net_tie_50mil 110.525,113.55 r270 top net-tie
NT3 "NT" Net_tie_50mil 108.725,115.175 r0 top net-tie
P1 "51281-2694" molex_51281-2694 111,90.2 r270 bottom locked
P2 "DNP" HDR2.00-2X3-SMD 106,83 r0 top locked
P3 "DNP" HDR2.00-2X3-SMD 100,83 r0 top locked
P4 "DNP" HDR2.00-2X3-SMD 94,83 r0 top locked
P5 "52885-0374" molex_52885-0374 87.64,100 r90 top locked
P9 "47309-8651" molex_47309-8651 89.425,84.925 r270 bottom locked
P10 "JST_S6B-ZR-SM4A-TF (LF)(SN)(P)" "JST_S6B-ZR-SM4A-TF (LF)(SN)(P)" 111.2,90.425 r270 top locked
Q1 "AO3416" SOT-23 104.6,91.2 r270 top
Q2 "Si1922EDH-T1-GE3" SC-70-6 103.35,84.85 r180 bottom
R1 "10k" RES0402_SENSE_DVT 85.901,114.285 r180 top
R2 "DNP" RES0402_SENSE_DVT 101.225,95.25 r90 bottom
R3 "DNP" RES0402_SENSE_DVT 100.3,95.258 r90 bottom
R4 "DNP" RES0402_SENSE_DVT 103.85,97.502 r0 top
R5 "2.7k" RES0402_SENSE_DVT 104.55,95.6 r180 bottom
R6 "10k" RES0402_SENSE_DVT 99.65,112.35 r270 top
R7 "10k" RES0402_SENSE_DVT 100.425,112.35 r270 top
R8 "150" RES0805_SENSE_DVT 111.775,97.375 r180 top
R9 "0" RES0402_SENSE_DVT 103.4,118.425 r0 bottom
R10 "1.5k" RES0603_SENSE_DVT 115.15,82.25 r270 top
R11 "2.7k" RES0402_SENSE_DVT 116.7,83.125 r180 top
R12 "10k" RES0402_SENSE_DVT 92.6,94.5 r90 bottom
R13 "2.7k" RES0402_SENSE_DVT 83.2,106.325 r180 top
R14 "2.7k" RES0402_SENSE_DVT 83.2,107.675 r180 top
R15 "0" RES0402_SENSE_DVT 112.226,79.2 r270 bottom
R16 "0" RES0402_SENSE_DVT 108.85,113.275 r180 top
R17 "DNP" RES0402_SENSE_DVT 89.4,88.725 r90 top
R18 "DNP" RES0402_SENSE_DVT 90.625,88.725 r90 top
R19 "33" RES0402_SENSE_DVT 108.6,77.375 r270 bottom
R20 "10" RES0402_SENSE_DVT 94.192,102.444 r180 top
R21 "0" RES0402_SENSE_DVT 93.6,92.95 r270 top
R22 "10k" RES0402_SENSE_DVT 78.975,91.15 r0 bottom
R23 "DNP" RES0402_SENSE_DVT 79.45,92.725 r90 bottom
R24 "DNP" RES0402_SENSE_DVT 77.7,93.675 r90 bottom
R25 "10k" RES0402_SENSE_DVT 77.7,95.575 r90 bottom
R26 "0" RES0402_SENSE_DVT 92.15,121.225 r90 bottom
R27 "10" RES0402_SENSE_DVT 109.425,98.25 r270 top
R28 "DNP" RES0402_SENSE_DVT 94.175,99.85 r180 top
R29 "100" RES0402_SENSE_DVT 104,87.25 r270 bottom
R30 "100" RES0402_SENSE_DVT 101.525,83.55 r0 bottom
R31 "100k" RES0402_SENSE_DVT 101.976,78.78 r0 bottom
R32 "100k" RES0402_SENSE_DVT 80.875,96.15 r180 top
R33 "DNP" RES0402_SENSE_DVT 93.6,91.25 r90 top
R34 "10k" RES0402_SENSE_DVT 81.15,100.125 r180 top
R35 "DNP" RES0402_SENSE_DVT 81.15,102.1 r180 top
R58 "10k" RES0402_SENSE_DVT 93.925,114.05 r90 bottom
R59 "10k" RES0402_SENSE_DVT 99.8,115.6 r90 bottom
R61 "10k" RES0402_SENSE_DVT 104.075,94.375 r270 bottom
R62 "215k" RES0402_SENSE_DVT 106,87.25 r90 bottom
R63 "523k" RES0402_SENSE_DVT 106,85.1 r90 bottom
R64 "215k" RES0402_SENSE_DVT 101.05,84.75 r270 bottom
R65 "523k" RES0402_SENSE_DVT 101.05,87.075 r270 bottom
R66 "1k" RES0402_SENSE_DVT 81.694,112.551 r0 top
R67 "2.21k" RES0402 81.694,111.701 r180 top
R70 "10" RES0402_SENSE_DVT 81.15,99.35 r0 top
R71 "10" RES0402_SENSE_DVT 95.375,97.525 r0 top
R72 "10" RES0402_SENSE_DVT 93.6,98.7 r180 top
R73 "10" RES0402_SENSE_DVT 93.6,95.925 r180 top
R75 "10" RES0402_SENSE_DVT 89.8,104.85 r90 bottom
R80 "215k" RES0402_SENSE_DVT 104.45,94.775 r270 top
R81 "215k" RES0402_SENSE_DVT 116.474,104.675 r270 top
RTC0 "AB-RTCMC-32.768kHz-AIGZ-S7" 8-CLCC 114.125,105.575 r270 top
TP1 "TP" TP-1.1 114.225,79.4 r90 top
TP2 "TP" TP-1.1 105.475,88.8 r90 top
TP3 "TP" TP-1.1 81.675,84.975 r90 top
TP5 "TP" TP-1.1 118.25,97.792 r90 top
TP6 "TP" TP-1.1 85.2,83.05 r90 top
TP7 "TP" TP-1.1 85.2,81.6 r90 top
TP8 "DNP" TP-1.1 76.775,103.425 r90 top
TP9 "TP" TP-1.1 106.425,96.6 r90 top
TP10 "TP" TP-1.1 81.675,86.475 r90 top
TP12 "TP" TP-1.1 76.275,93.95 r90 top
TP13 "TP" TP-1.1 85.2,85.95 r90 top
TP14 "TP" TP-1.1 85.2,84.5 r90 top
TP15 "TP" TP-1.1 76.275,96.775 r90 top
TP16 "TP" TP-1.1 81.675,83.475 r90 top
U1 "CC3200" QFN50P900X900X100_HS-65N 103,105 r90 bottom locked
U2 "MX25U12835F" "WSON 8L" 97.425,91.12 r180 bottom locked
U3 "DEA202450BT-1294C1-H" DEA202450BT-1294C1-H 96.75,109.675 r180 bottom locked
U4 "SN74LVC1T45DCK" SC-70-6 80.9,87.4 r0 bottom
U5 "TXS0108ERGYR" QFN50P450X350X100_HS-21N 97.2,90.975 r180 top
U6 "DNP" SC-70-5 109.7,79.293 r270 bottom
U7 "TPS7A7100RGT" QFN50P300X300X100_HS-17N 119.775,104.45 r270 bottom locked
U14 "PE4259" SOT65P212X110-6N 96.75,115.45 r270 bottom locked
X2 "ABM3B-40.000MHZ-10-1-U-T" ABM3B_CRYSTAL 94.2,103.425 r270 bottom locked

## Footprints (in the part's own frame and the unit in brackets; to place one, negate y for a bottom-side part, rotate by r counter-clockwise, add the part's x,y. Pads: shape width x height; smd on the part's side, far side on the other; paste and mask are expansions set on the pad)
8-CLCC [mm] "8 lead CLCC package, 2.3 x 1.5mm"
  rect 0.5x0.6 smd: 1(-1.35,-0.45) 2(-0.45,-0.45) 3(0.45,-0.45) 4(1.35,-0.45) 5(1.35,0.45) 6(0.45,0.45) 7(-0.45,0.45) 8(-1.35,0.45)
  silkscreen extent -1.78,-0.92 1.78,0.92, body extent -1.5,-0.55 1.7,0.95, height 0.8
ABM3B_CRYSTAL [mm] "Abracon ABM3B series crystals"
  rect 1.8x1.2 smd: 1(-2,-1.2) 2(2,-1.2) 3(2,1.2) 4(-2,1.2)
  silkscreen extent -3.45,-2.35 -3.25,-2.15, body extent -2.5,-1.6 2.5,1.6, height 1.1
Antenna_meander_2.4GHz_middle [mm]
  round 0.2 smd paste+0 mask+0.102: 1(3.45,0)
  round 0.5 hole 0.2: 2(-12.04,-6.807) 2(-10.774,-7.394) 2(-9.389,-8.043) 2(-8.029,-8.677) 2(-7.059,-8.669) 2(-6.399,-7.769) 2(-5.629,-6.618) 2(-4.76,-5.512) 2(-3.685,-4.331) 2(-2.515,-3.36) 2(-1.342,-2.5) 2(-0.078,-1.682) 2(1.175,-0.983) 2(2.405,-0.44) 2(5.221,0.607) 2(6.176,7.281) 2(6.301,6.231) 2(6.451,4.981) 2(6.601,3.731) 2(6.751,2.481) 2(6.896,1.057)
  Top Layer lines w1: 5.221,0.607 4.111,6.384 ; 4.108,6.383 ccw(c10.401,-18.844) -0.997,4.525 0.319,1.829 ccw(c10.401,-18.844) -2.126,0.446 -3.76,2.962 ccw(c10.401,-18.844) -6.311,1.074 -4.383,-1.225 ccw(c10.401,-18.844) -6.42,-3.158 -8.614,-1.112 ccw(c10.401,-18.844) -10.363,-3.196 ; 3.45,0 1.679,5.636
  Multi-Layer pour cut-out: -13.441,-5.85 -7.369,-8.681 -5.864,-6.515 -4.911,-5.304 -3.782,-4.065 -2.556,-3.092 -1.372,-2.21 -0.086,-1.363 1.124,-0.725 3.436,0.293 5.121,0.831 6.631,1.23 5.852,7.912 0.8,6.708 -3.713,4.6 -6.339,2.755 -8.828,0.495 -10.217,-1.064 -11.515,-2.666 -12.59,-4.261
  body extent -13.44,-8.68 6.63,7.91, height 0.1
Antenna_Pads [mm] "Antenna pads for external IFA"
  rect 1.8x1.3 smd: 1(-1.75,0) 2(1.75,0)
CAP0402_SENSE_DVT [mil] "Chip Capacitor, 2-Leads"
  rect 18x24 smd: 1(-19,0) 2(19,0)
  body extent -21,-11 21,11, height 22
CAP0603_SENSE_DVT [mil] "Chip Capacitor, 2-Leads"
  rect 30x35 smd: 1(-31,0) 2(31,0)
  body extent -31,-16 32,16, height 31
CAP0805_SENSE_DVT [mil] "Chip Capacitor, 2-Leads"
  rect 45x55 smd: 1(-40,0) 2(40,0)
  body extent -39,-25 39,25, height 20
CAP1206_SENSE_DVT [mil] "Chip Capacitor, 2-Leads"
  rect 50x63 smd: 1(-60.5,0) 2(60.5,0)
  body extent -64,-31 65,31, height 63
DEA202450BT-1294C1-H [mm] "SAW filter 2.4 GHz WLAN"
  rect 0.35x0.35 smd paste-0.05: 1(0,-0.325) 3(0,0.325)
  rect 0.45x1 smd paste-0.05: 2(0.55,0) 4(-0.55,0)
  body extent -1,-0.65 1,0.65, height 0.8
HDR2.00-2X3-SMD [mil] "HEADER, 2X3, 2.00MM PITCH, VERT 3.5MM, LEOCO 2018"
  rrect50% 40x90 smd paste-78.74: 1(-78.74,-75) 2(-78.74,75) 3(0,-75) 4(0,75) 5(78.74,-75) 6(78.74,75)
  silkscreen extent -128,-123 118,98, body extent -118,-128 118,128, height 264
HOLE_ROUND_1.8mm [mm]
  round 1.2 hole 1.8 unplated paste-2 mask-2: 1(0,0)
HOLE_ROUND_2.2mm [mm]
  round 1.2 hole 2.2 unplated paste-3 mask-3: 1(0,0)
IND_1008 [mm] "Inductor footprint 1008"
  rect 0.8x2.2 smd: 1(-1.05,0) 2(1.05,0)
  body extent -1.25,-0.9 1.25,0.9, height 1.8
"JST_S6B-ZR-SM4A-TF (LF)(SN)(P)" [mm] "JST connector, 6-pin, 1.5mm pitch"
  rect 0.7x1.5 smd: 1(-3.75,0) 2(-2.25,0) 3(-0.75,0) 4(0.75,0) 5(2.25,0) 6(3.75,0)
  Top Layer region: -6.25,2.725 -5.15,2.725 -5.15,4.625 -6.25,4.625
  Top Layer region: 6.25,4.625 5.15,4.625 5.15,2.725 6.25,2.725
  silkscreen extent -6,-0.12 6,5.75, body extent -6,-0.75 6,5.75, height 3.7
molex_47309-8651 [mm] "molex sd card connector"
  rect 0.6x1.25 smd: 1(3.85,4.175) 2(2.75,4.175) 3(1.65,4.175) 4(0.55,4.175) 5(-0.55,4.175) 6(-1.65,4.175) 7(-2.75,4.175) 8(-3.85,4.175)
  rect 1.2x3.79 smd: G1(-5,1.7)
  rect 1.45x1.4 smd: G2(5.475,2.55)
  rect 1x0.6 smd: G3(5.7,1.2)
  rect 0.95x0.85 smd: G4(4.775,0.225)
  body extent -5.4,0 6,5.5, height 2.65
molex_51281-2694 [mm] "Molex 26-pin 0.5mm pitch connector"
  rect 0.35x0.8 smd: 1(-6.25,0) 2(-5.75,0) 3(-5.25,0) 4(-4.75,0) 5(-4.25,0) 6(-3.75,0) 7(-3.25,0) 8(-2.75,0) 9(-2.25,0) 10(-1.75,0) 11(-1.25,0) 12(-0.75,0) 13(-0.25,0) 14(0.25,0) 15(0.75,0) 16(1.25,0) 17(1.75,0) 18(2.25,0) 19(2.75,0) 20(3.25,0) 21(3.75,0) 22(4.25,0) 23(4.75,0) 24(5.25,0) 25(5.75,0) 26(6.25,0)
  Top Layer region: -7.45,-1 -6.85,-1 -6.85,-3.6 -7.45,-3.6
  Top Layer region: 6.85,-1 7.45,-1 7.45,-3.6 6.85,-3.6
  silkscreen extent -7.62,-3.78 7.63,-0.15, body extent -7.55,-3.77 7.55,0.28, height 1.15
molex_52885-0374 [mm] "Molex 30-pin 0.635mm pitch receptacle connector"
  rect 0.4x1.8 smd mask+0.12: 1(-4.445,-2.1) 2(-4.443,2.1) 3(-3.81,-2.1) 4(-3.808,2.1) 5(-3.175,-2.1) 6(-3.173,2.1) 7(-2.54,-2.1) 8(-2.538,2.1) 9(-1.905,-2.1) 10(-1.903,2.1) 11(-1.27,-2.1) 12(-1.268,2.1) 13(-0.635,-2.1) 14(-0.633,2.1) 15(0,-2.1) 16(0.002,2.1) 17(0.635,-2.1) 18(0.637,2.1) 19(1.27,-2.1) 20(1.272,2.1) 21(1.905,-2.1) 22(1.907,2.1) 23(2.54,-2.1) 24(2.542,2.1) 25(3.175,-2.1) 26(3.177,2.1) 27(3.81,-2.1) 28(3.812,2.1) 29(4.445,-2.1) 30(4.447,2.1)
  round 0.9 hole 0.9 unplated: ""(-6.1,0)
  round 0.7 hole 0.7 unplated: ""(6.1,0)
  Top Layer region: 9.4,1 6.9,1 6.9,-1 9.4,-1
  Top Layer region: -9.4,-1 -6.9,-1 -6.9,1 -9.4,1
  silkscreen extent -8.7,-3.2 8.7,3.2, body extent -8.7,-3.2 8.7,3.2, height 4.23
Net_tie_50mil [mm] "Trace to bridge 2 hoels in a 50 mil pitch connector"
  round 0.1 smd paste-1 mask-1: 1(-0.625,0) 2(0.625,0)
  Top Layer lines w0.5: 0.625,0 -0.645,0
QFN50P300X300X100_HS-17N [mm] "QFN, 16-Leads, Body 3.00x3.00mm, Pitch 0.50mm, Thermal Pad 1.66x1.66mm, IPC Medium Density"
  oval 0.8x0.28 smd: 1(-1.5,0.75) 2(-1.5,0.25) 3(-1.5,-0.25) 4(-1.5,-0.75) 9(1.5,-0.75) 10(1.5,-0.25) 11(1.5,0.25) 12(1.5,0.75)
  oval 0.28x0.8 smd: 5(-0.75,-1.5) 6(-0.25,-1.5) 7(0.25,-1.5) 8(0.75,-1.5) 13(0.75,1.5) 14(0.25,1.5) 15(-0.25,1.5) 16(-0.75,1.5)
  round 0.5 hole 0.2: 17(-0.5,0.5) 17(-0.5,-0.5) 17(0.5,0.5) 17(0.5,-0.5)
  rect 1.66x1.66 smd paste-5: 17(0,0)
  silkscreen extent -2.5,-1.73 1.73,1.73, body extent -1.58,-1.58 1.58,1.58, height 1
QFN50P450X350X100_HS-21N [mm] "QFN, 20-Leads, Body 4.50x3.50mm, Pitch 0.50mm/1.50mm, Thermal Pad 3.05x2.05mm, IPC Medium Density"
  oval 0.9x0.28 smd: 1(-2.25,-0.75) 10(2.25,-0.75) 11(2.25,0.75) 20(-2.25,0.75)
  oval 0.28x0.9 smd: 2(-1.75,-1.75) 3(-1.25,-1.75) 4(-0.75,-1.75) 5(-0.25,-1.75) 6(0.25,-1.75) 7(0.75,-1.75) 8(1.25,-1.75) 9(1.75,-1.75) 12(1.75,1.75) 13(1.25,1.75) 14(0.75,1.75) 15(0.25,1.75) 16(-0.25,1.75) 17(-0.75,1.75) 18(-1.25,1.75) 19(-1.75,1.75)
  rect 3.05x2.05 smd: 21(0,0)
  silkscreen extent -3.15,-1.83 2.32,1.82, body extent -2.17,-1.68 2.17,1.67, height 1
QFN50P900X900X100_HS-65N [mm] "QFN, 64-Leads, Body 9.00x9.00mm, Pitch 0.50mm, Thermal Pad 7.25x7.25mm, IPC Medium Density"
  oval 0.8x0.2 smd: 1(-4.5,3.75) 2(-4.5,3.25) 3(-4.5,2.75) 4(-4.5,2.25) 5(-4.5,1.75) 6(-4.5,1.25) 7(-4.5,0.75) 8(-4.5,0.25) 9(-4.5,-0.25) 10(-4.5,-0.75) 11(-4.5,-1.25) 12(-4.5,-1.75) 13(-4.5,-2.25) 14(-4.5,-2.75) 15(-4.5,-3.25) 16(-4.5,-3.75) 33(4.5,-3.75) 34(4.5,-3.25) 35(4.5,-2.75) 36(4.5,-2.25) 37(4.5,-1.75) 38(4.5,-1.25) 39(4.5,-0.75) 40(4.5,-0.25) 41(4.5,0.25) 42(4.5,0.75) 43(4.5,1.25) 44(4.5,1.75) 45(4.5,2.25) 46(4.5,2.75) 47(4.5,3.25) 48(4.5,3.75)
  oval 0.2x0.8 smd: 17(-3.75,-4.5) 18(-3.25,-4.5) 19(-2.75,-4.5) 20(-2.25,-4.5) 21(-1.75,-4.5) 22(-1.25,-4.5) 23(-0.75,-4.5) 24(-0.25,-4.5) 25(0.25,-4.5) 26(0.75,-4.5) 27(1.25,-4.5) 28(1.75,-4.5) 29(2.25,-4.5) 30(2.75,-4.5) 31(3.25,-4.5) 32(3.75,-4.5) 49(3.75,4.5) 50(3.25,4.5) 51(2.75,4.5) 52(2.25,4.5) 53(1.75,4.5) 54(1.25,4.5) 55(0.75,4.5) 56(0.25,4.5) 57(-0.25,4.5) 58(-0.75,4.5) 59(-1.25,4.5) 60(-1.75,4.5) 61(-2.25,4.5) 62(-2.75,4.5) 63(-3.25,4.5) 64(-3.75,4.5)
  rect 7.25x7.25 smd paste-10: 65(0,0)
  silkscreen extent -5.5,-4.72 4.72,4.73, body extent -4.58,-4.57 4.57,4.58, height 1
RES0402 [mm] "Chip resistor 0402 high density"
  rect 0.45x0.4 smd: 1(-0.475,0) 2(0.475,0)
  body extent -0.61,-0.2 0.6,0.2, height 0.5
RES0402_SENSE_DVT [mil] "Chip resistor 0402"
  rect 18x20 smd: 1(-19,0) 2(19,0)
  body extent -24,-8 24,8, height 20
RES0603_SENSE_DVT [mil] "Chip resistor 0603"
  rect 35x35 smd: 1(-29.5,0) 2(29.5,0)
  body extent -33,-16 33,16, height 20
RES0805_SENSE_DVT [mil] "Chip resistor 0805"
  rect 45x50 smd: 1(-42,0) 2(42,0)
  body extent -55,-18 54,18, height 20
SC-70-5 [mm] "SC-70 with 5 leads"
  rect 0.4x0.9 smd paste-0.05: 1(-0.65,-1.1) 2(0,-1.1) 3(0.65,-1.1) 4(0.65,1.1) 5(-0.65,1.1)
  silkscreen extent -1.35,-1.85 1.12,0.72, body extent -1.1,-0.7 1.1,0.7, height 1.1
SC-70-6 [mm] "SC-70 with 6 leads"
  rect 0.4x0.75 smd paste-0.05: 1(-0.64,-1) 2(0,-1) 3(0.64,-1) 4(0.64,1) 5(0,1) 6(-0.64,1)
  silkscreen extent -1.35,-1.85 -1.15,-1.65, body extent -1.1,-1.2 1.1,1.2, height 1.1
SOD-323 [mm] "SOD-323 (SC-76) diode package"
  rect 1.05x0.55 smd: 1(-1.4,0) 2(1.4,0)
  silkscreen extent -2.15,-0.75 -2.15,0.75, body extent -1.22,-0.62 1.28,0.63, height 0.95
SOT65P212X110-6N [mm] "SOT23, 6-Leads, Body 2.3x2.3mm (max), Pitch 0.65mm, IPC Medium Density"
  oval 0.85x0.35 smd: 1(-0.95,0.65) 2(-0.95,0) 3(-0.95,-0.65) 5(0.95,0)
  oval 0.75x0.35 smd: 4(0.95,-0.65) 6(0.95,0.65)
  silkscreen extent -1.45,-1.33 0.88,1.47, body extent -0.67,-1.13 0.68,1.13, height 1.1
SOT-23 [mm]
  rect 0.8x0.9 smd paste-0.1: 1(-0.95,-1) 2(0.95,-1) 3(0,1)
  silkscreen extent -1.77,-1.87 -1.58,-1.68, body extent -1.25,-1.03 1.25,0.87, height 1.15
TP-1.1 [mm] "1.1mm TestPoint"
  round 1.1 smd paste-1: 1(0,0)
"WSON 8L" [mm] "WSON 8L 8x6x0.8mm"
  rrect50% 1.3x0.45 smd: 1(-3.75,1.905) 2(-3.75,0.635) 3(-3.75,-0.635) 4(-3.75,-1.905) 5(3.75,-1.905) 6(3.75,-0.635) 7(3.75,0.635) 8(3.75,1.905)
  silkscreen extent -4.15,-3.15 4.15,3.15, body extent -4,-3 4,3, height 0.8

## Part data
A1: library part Antenna_meander_2.4GHz_middle, "Meander antenna printed on PCB"
A2: "PCB pads for external IFA"
C1 C6 C12 C13 C27: library part C_10u_10_6.3_X5R_0603, "Chip capacitor"
C2 C28: library part C_100u_20_10_X5R_1206, "Chip capacitor"
C3 C38 C39 C45 C83 C84: library part C_0.1u_10_50_X7R_0402, "Chip capacitor"
C4 C30 C31 C32 C33 C34 C44: library part C_2200p_5_16_STD_0402, "Chip capacitor"
C5 C14 C18 C19 C20 C21 C22 C23 C24 C29 C35 C42 C61: library part C_0.1u_20_16_X7R_0603, "Chip capacitor"
C7 C43: library part C_100u_20_6.3_X5R_1206, "Chip capacitor"
C8 C10: library part C_10p_2_50_C0G_0402, "Chip capacitor"
C9: library part C_1u_10_16_X5R_0603, "Chip capacitor"
C11: library part C_10000p_10_50_X7R_0402, "Chip capacitor"
C15 C16 C17: library part C_4.7u_20_10_X5R_0603, "Chip capacitor"
C25 C26: library part C_9p_0.1_50_C0G_0402, "Chip capacitor"
C36: library part C_22u_10_20_JB_0603, "Chip capacitor"
C37 C40: library part C_10u_20_10_X7R_0805, "Chip capacitor"
C41: library part C_220p_5_50_NP0_0402, "Chip capacitor"
C46 C47 C48 C49: library part C_2.2p_0.05_50_C0G_0402, "Chip capacitor"
C58 C59: library part C_1000p_10_50_X7R_0402, "Chip capacitor"
D1 D2: "Standard diode, 75V 150mA"
FB1: library part FB_300_2_0.15_0603, "Ferrite bead, 300 ohm impedance"
H1 H2 H3 H4: library part Hole, "general purpose hole"
L3: library part L_2.2u_20_?_0.08_?_1.3, "SMD power inductor, 2.2uH"
NT1 NT2 NT3: library part "Net tie_50mil", "Net tie to bridge 50 mil spacing connector holes"
P1: library part molex_51281-2694, "Molex 26-pin 0.5mm pitch connector"
P2 P3 P4: library part HDR2.00-2X3-SMD, "BOB headers"
P5: library part molex_52885-0374, "Molex 30-pin 0.635mm pitch receptacle connector"
P9: library part molex_47309-8651, "Molex SD card connector"
P10: "6-pin JST connector"
Q1: "N-channel enhancement mode FET"
Q2: "Vishay Dual N-Channel MOSFET Si1922EDH-T1-GE3"
R1 R6 R7 R12 R22 R23 R24 R25 R34 R35 R58 R59 R61: library part R_10k_5_0.1_0402, "Chip Resistor"
R2 R3 R4 R9 R15 R16 R21 R26 R28 R33: library part R_0_jumper_0.1_0402, "Chip Resistor"
R5 R11 R13 R14: library part R_2.7k_5_0.1_0402, "Chip Resistor"
R8: library part R_150_5_0.125_0805, "Chip Resistor"
R10: library part R_1.5k_1_0.1_0603, "Chip Resistor"
R17 R18 R31 R32: library part R_100k_1_0.1_0402, "Chip Resistor"
R19: library part R_33_5_0.1_0402, "Chip Resistor"
R20 R27 R70 R71 R72 R73 R75: library part R_10_1_0.1_0402, "Chip Resistor"
R29 R30: library part R_100_1_0.1_0402, "Chip Resistor"
R62 R64 R80 R81: library part R_215k_1_0.1_0402, "Chip Resistor"
R63 R65: library part R_523k_1_0.1_0402, "Chip Resistor"
R66: library part R_1k_1_0.1_0402, "Chip Resistor"
R67: library part R_2.21k_1_0.1_0402_1, "Chip Resistor"
RTC0: "Abracon I2C RTC w/ integrated XO"
TP1 TP2 TP3 TP5 TP6 TP7 TP9 TP10 TP12 TP13 TP14 TP15 TP16: "testpoint"
TP8: library part TP, "testpoint"
U1: "TI Wi-FI module"
U2: "Macronix MX25U12835F SPI NOR Flash"
U3: "SAW filter for 2.4 GHz WLAN"
U4: "Single-bit dual-supply bus transceiver"
U5: "8-BIT BIDIRECTIONAL VOLTAGE-LEVEL TRANSLATOR  FOR OPEN-DRAIN AND PUSH-PULL APPLICATIONS"
U6: library part OPA314AIDCKT, "TI single 1.8-5.5V OPAMP"
U7: "1A fast-transient LDO"
U14: "RF Switch"
X2: library part Crystal_40M_50_50_18_50, "Abracon 40 MHz crystal"

## Via types
v1: diameter 0.559, hole 0.305, Top Layer to Bottom Layer, 105 vias
v2: diameter 0.5, hole 0.2, Top Layer to Bottom Layer, 104 vias
v3: diameter 0.5, hole 0.2, Top Layer to Bottom Layer, tented both sides, 66 vias
v4: diameter 0.51, hole 0.2, Top Layer to Bottom Layer, tented both sides, 64 vias
v5: diameter 0.51, hole 0.2, Top Layer to Bottom Layer, 58 vias
v6: diameter 0.6, hole 0.3, Top Layer to Bottom Layer, 33 vias
v7: diameter 0.559, hole 0.305, Top Layer to Bottom Layer, tented both sides, 16 vias
v8: diameter 0.559, hole 0.305, Top Layer to Bottom Layer, tented bottom, 1 vias

## Nets (pads, with @x,y where several pads share a name; then routed paths per layer and width w, separated by ;. In a path a pad name is that pad's centre, name@x,y a point inside that pad or via, vN(x,y) a via of type N, cw(c..) or ccw(c..) an arc to the next point about the centre after c; other vN are vias at no path point)
1.2V: C22.2 C24.1 C27.2 L3.1 U1.9 U1.56 | length 31.4
  Top Layer w0.2: v2(102.75,99) C22.2@102.75,100.288
  Top Layer w0.3: C22.2@102.75,100.288 C22.2@102.975,100.513 C27.2@104.075,100.513 ; C24.1@107.5,104.5 108,104.5 108.3,104.8 v2(108.3,105.25)
  Top Layer w0.5: v1(102.85,113.95) L3.1@104.5,113.95
  Signal Layer 1 w0.5: v2(102.75,99) 102.066,99 101.625,99.441 101.625,100.178 102.081,100.635 106.318,100.635 107.421,101.738 107.421,104.371 v2(108.3,105.25) 105.331,108.219 102.85,110.7 v1(102.85,113.95)
  Bottom Layer w0.2: v2(102.75,99) U1.9@102.75,100.5 ; U1.56@107.5,105.25 v2(108.3,105.25)
1.8V: C3.2 C7.2 C32.1 C37.2 C38.2 C40.2 C41.2 C43.2 C83.2 NT2.2 P1.7 P1.8 P2.4 P5.2 P5.4 R12.1 R13.2 R14.2 R21.1 R23.2 R25.2 R32.2 R66.2 R81.2 RTC0.5 U2.8 U4.1 U4.5 U5.2 U7.1 U7.15 U7.16 | length 70.7
  Top Layer w0.2: v2(79.65,96.15) R32.2@80.4,96.15 ; R66.2@82.176,112.551 v7(83.119,112.551) ; v7(82.717,105.375) R13.2@82.717,106.325 R14.2@82.717,107.675 ; v1(92.6,93.025) 93.008,93.433 R21.1@93.6,93.433 ; C83.2@100.767,92.875 C83.2@100.85,92.958 ; v3(106,83.35) P2.4@106,84.905 ; RTC0.5@114.575,104.225 v1(115.575,104.225) 116.442,104.225 R81.2@116.474,104.192
  Top Layer w0.25: v3(79.5,88.4) 79.7,88.4 79.983,88.683 C38.2@80.325,88.683
  Top Layer w0.3: U5.2@98.95,92.875 C83.2@100.767,92.875 ; v3(100.75,93.65) 100.85,93.55 C83.2@100.85,92.958 ; v1(111.075,109.25) v1@111.125,109.2 ; C43.2@112.075,109.338 C43.2@112.213,109.2 ; v1(116.65,107.125) 116.995,107.125 ; C40.2@117.57,108.125 C40.2@117.795,107.9
  Top Layer w0.4: v1@84.25,95.849 84.542,95.557 P5.2@85.54,95.557 ; v1(84.25,95.9) 84.542,96.192 P5.4@85.54,96.192
  Top Layer w0.5: v1(110.525,112.925) v1(111.525,112.925) ; v1(111.075,109.25) v1(111.075,110.25) v1(111.075,111.25) v1(112.075,111.25) C43.2@112.075,109.35 ; v1@111.075,110.475 v1(112.075,110.475) ; v1@111.125,109.2 C43.2@112.213,109.2 ; v1@115.555,106.129 v1@115.555,107.13 ; v1@115.57,106.137 v1@116.571,106.137 ; v1@115.57,107.137 v1@116.571,107.137 ; v1@116.645,106.137 C37.2@117.646,106.137 ; v1(116.65,106.125) v1(116.65,107.125) ; 116.995,107.125 C37.2@117.795,106.325 ; C40.2@117.57,108.125 v1(116.65,108.125) v1(116.65,107.125) ; C41.2@120.192,109.25 119.145,109.25 C40.2@117.795,107.9 117.02,107.125 v1(116.65,107.125)
  Bottom Layer w0.2: R25.2@77.7,96.05 v1(77.7,96.675) ; R23.2@79.45,93.2 v1(80.075,93.2) ; v3(80.825,84.375) 80.825,85.425 80.9,85.5 U4.5@80.9,86.4 ; C3.2@90.675,93.775 91.425,93.025 v1(92.6,93.025) ; R12.1@92.6,94.025 v1(92.6,93.025) ; U2.8@93.675,93.025 v1(92.6,93.025) ; v1(117.768,109.75) 117.768,109.257 119.025,108 U7.1@119.025,105.95
  Bottom Layer w0.25: C32.1@109.1,93.2 v1(110.025,93.2) ; P1.8@111,92.95 110.275,92.95 v1(110.025,93.2) ; P1.7@111,93.45 110.275,93.45 v1(110.025,93.2)
  Bottom Layer w0.3: v3(79.5,88.4) U4.1@80.26,88.4 ; v1(111.075,109.25) v1@111.136,109.189 ; 117.367,104.7 U7.15@118.275,104.7 ; 117.675,105.2 U7.16@118.275,105.2
  Bottom Layer w0.4: 116.65,105.417 117.367,104.7
  Bottom Layer w0.5: v1@111.036,111.25 v1@112.113,111.25 ; v1@111.075,109.211 v1@111.075,111.263 ; v1(111.075,109.25) C7.2@112.152,109.25 ; v1@111.075,110.475 v1(112.075,110.475) ; C7.2@112.075,109.236 v1@112.075,111.288 ; v1(116.65,106.125) v1(115.542,106.125) 115.542,107.138 116.637,107.138 v1(116.65,107.125)
  Bottom Layer w0.6: 117.675,105.2 117.675,106.642
  Bottom Layer w0.7: v1(116.65,107.125) v1(116.65,108.125) v1@116.65,108.146
  Bottom Layer w0.8: 116.65,105.417 v1(116.65,106.125) v1(116.65,107.125) 117.192,107.125 117.675,106.642
  other v1: 115.555,107.138
3.3V: C9.2 C31.1 C39.2 C45.2 C84.2 P1.4 P1.5 P5.28 P5.30 P9.4 TP8.1 U4.6 U5.19 U6.5 U7.12 U7.13 U7.14 | length 143
  Top Layer w0.25: TP8.1@76.775,103.425 77.475,104.125 v1(83.275,104.125) ; v3(79.475,86.4) 79.758,86.117 C39.2@80.325,86.117
  Top Layer w0.3: v3(98.45,87.45) 99.333,87.45 99.333,88.692 U5.19@98.95,89.075
  Top Layer w0.4: P5.28@85.54,103.812 84.538,103.812 v1(84.225,104.125) 84.547,104.447 P5.30@85.54,104.447
  Top Layer w0.5: v1(83.275,104.125) v1(84.225,104.125) ; v1(116.725,102.475) 117.832,102.475 C9.2@118.25,102.057
  PWR w0.5: v3(79.475,86.4) 81.022,86.4 ; v1(83.275,104.125) 82.4,103.25 82.4,98.123 83.081,97.443 84.95,97.443 ; v1@83.275,104.135 v1@84.225,104.135 ; v3(98.45,87.45) 98.45,87.475 98.525,87.55 99.668,87.55 100.418,88.3 102.473,88.3 ; 101.425,94.75 104.355,94.75 105.622,93.483 ; v3(107.65,79.225) 108.625,80.2 108.625,83.609 108.033,84.201 108.033,93.22
  PWR w0.65: 109.512,94.7 v1(110.025,94.7) ; v1@109.898,94.696 111.196,94.696
  PWR w0.8: v1(83.125,84.375) 83.047,84.375 81.022,86.4 80.345,87.077 80.345,89.725 81.157,90.537 84.188,90.537 87.687,87.038 95.418,87.038 95.78,86.675 100.848,86.675 102.473,88.3 105.937,91.765 105.937,92.425 106.68,93.167 ; 84.95,97.443 85.668,96.725 88.3,96.725 90.125,94.9 101.275,94.9 101.425,94.75 ; 105.622,93.483 105.937,93.167 106.68,93.167 ; 109.512,94.7 107.98,93.167 106.68,93.167 ; 111.196,94.696 111.946,94.696 116.078,98.828 116.078,101.828 v1(116.725,102.475) v1(116.725,103.475)
  Bottom Layer w0.25: v3(79.475,86.4) U4.6@80.26,86.4 ; C31.1@109.1,94.7 v1(110.025,94.7) ; 110.275,94.45 P1.5@111,94.45 ; 110.275,94.95 P1.4@111,94.95 112.25,94.95 ; 110.525,94.45 111.7,94.45
  Bottom Layer w0.3: v1(110.025,94.7) 110.275,94.45 ; v1@110.045,94.7 110.295,94.95 ; 116.942,104.2 U7.14@118.275,104.2 ; 117.55,103.7 U7.13@118.275,103.7 ; 118.15,102.95 U7.12@119.025,102.95
  Bottom Layer w0.5: v1(83.125,84.375) P9.4@85.25,84.375 ; v3(107.65,79.225) 107.65,79.908 C45.2@107.633,79.925 107.65,79.943 U6.5@108.6,79.943 ; 111.7,94.45 v1(112.925,95.675) ; v1(116.725,102.475) 117.675,102.475 118.15,102.95 ; 116.942,104.2 116.725,103.983 v1(116.725,103.475) 117.325,103.475 117.55,103.7